# Altium PCB [1]BMS_AFE.PcbDoc (part 1 of 3)
Units mm, origin at the board's own origin, x right, y up, seen from the top; angles counter-clockwise.
Board outline 110 x 135 mm, 4 copper layers (Top Layer, Layer 1, Layer 2, Bottom Layer), stack 2.022 mm thick; 197 components, 113 nets, 551 pads, 368 vias.
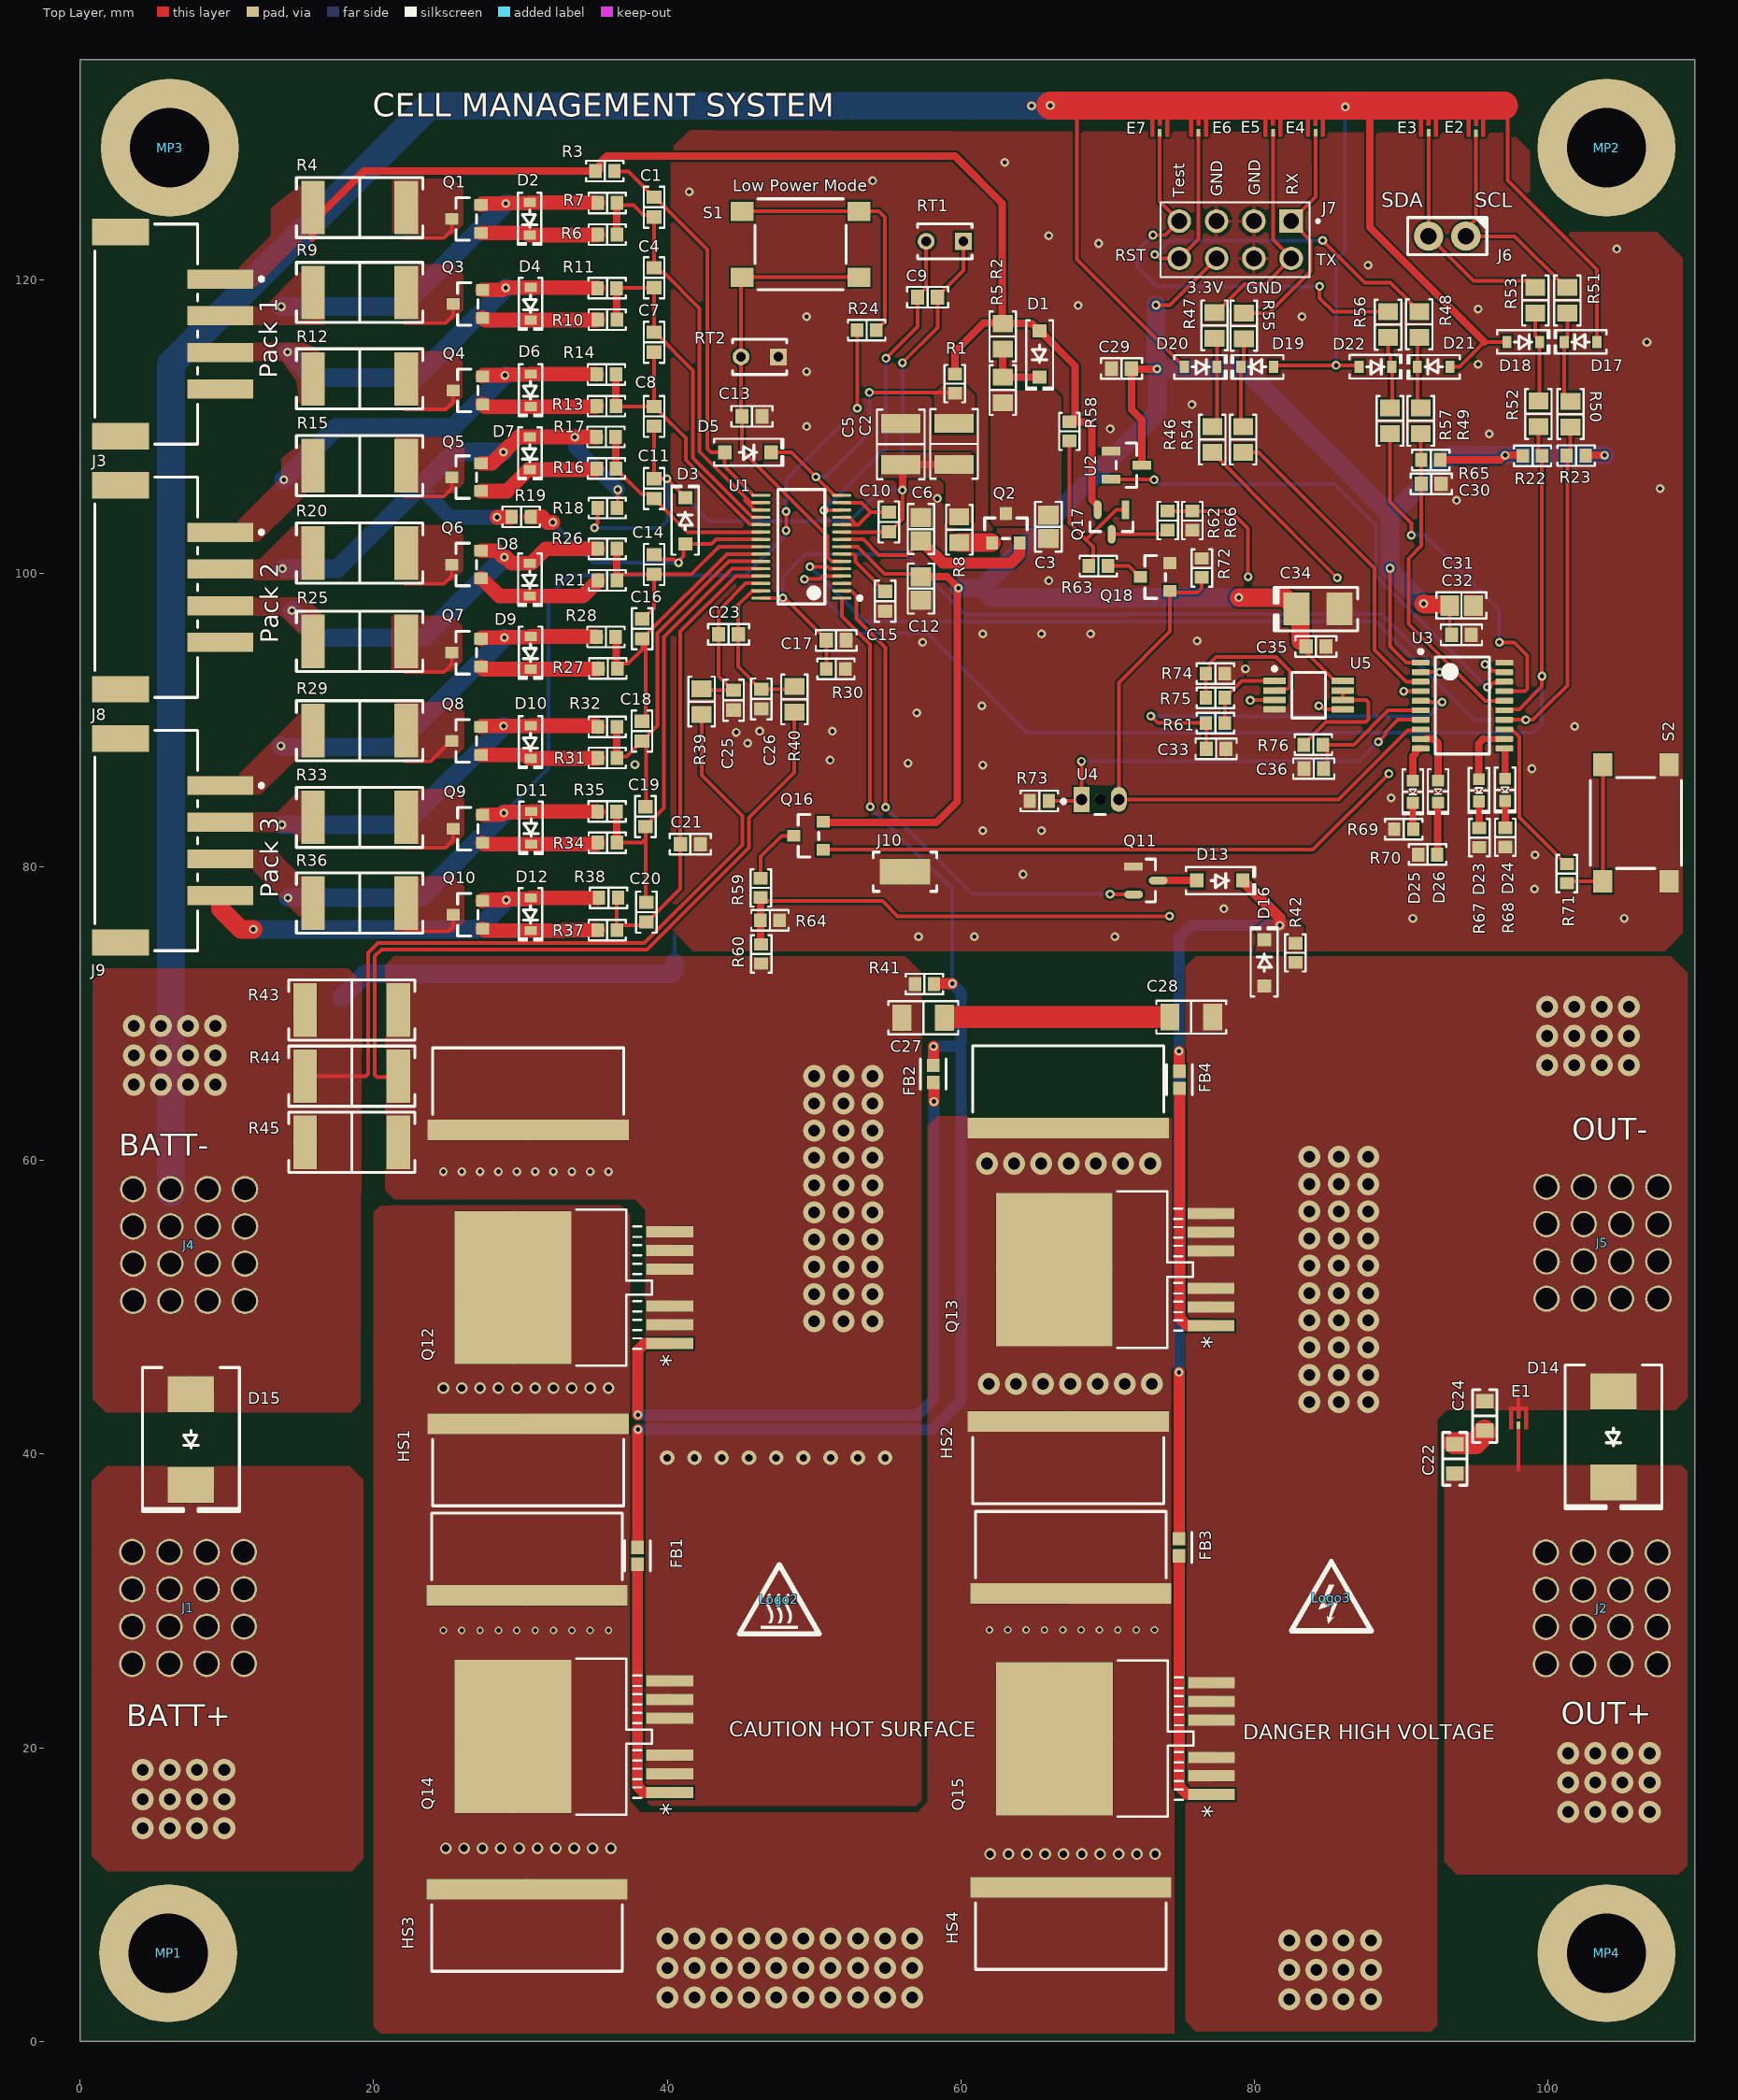
[diagram p0: Top Layer view]
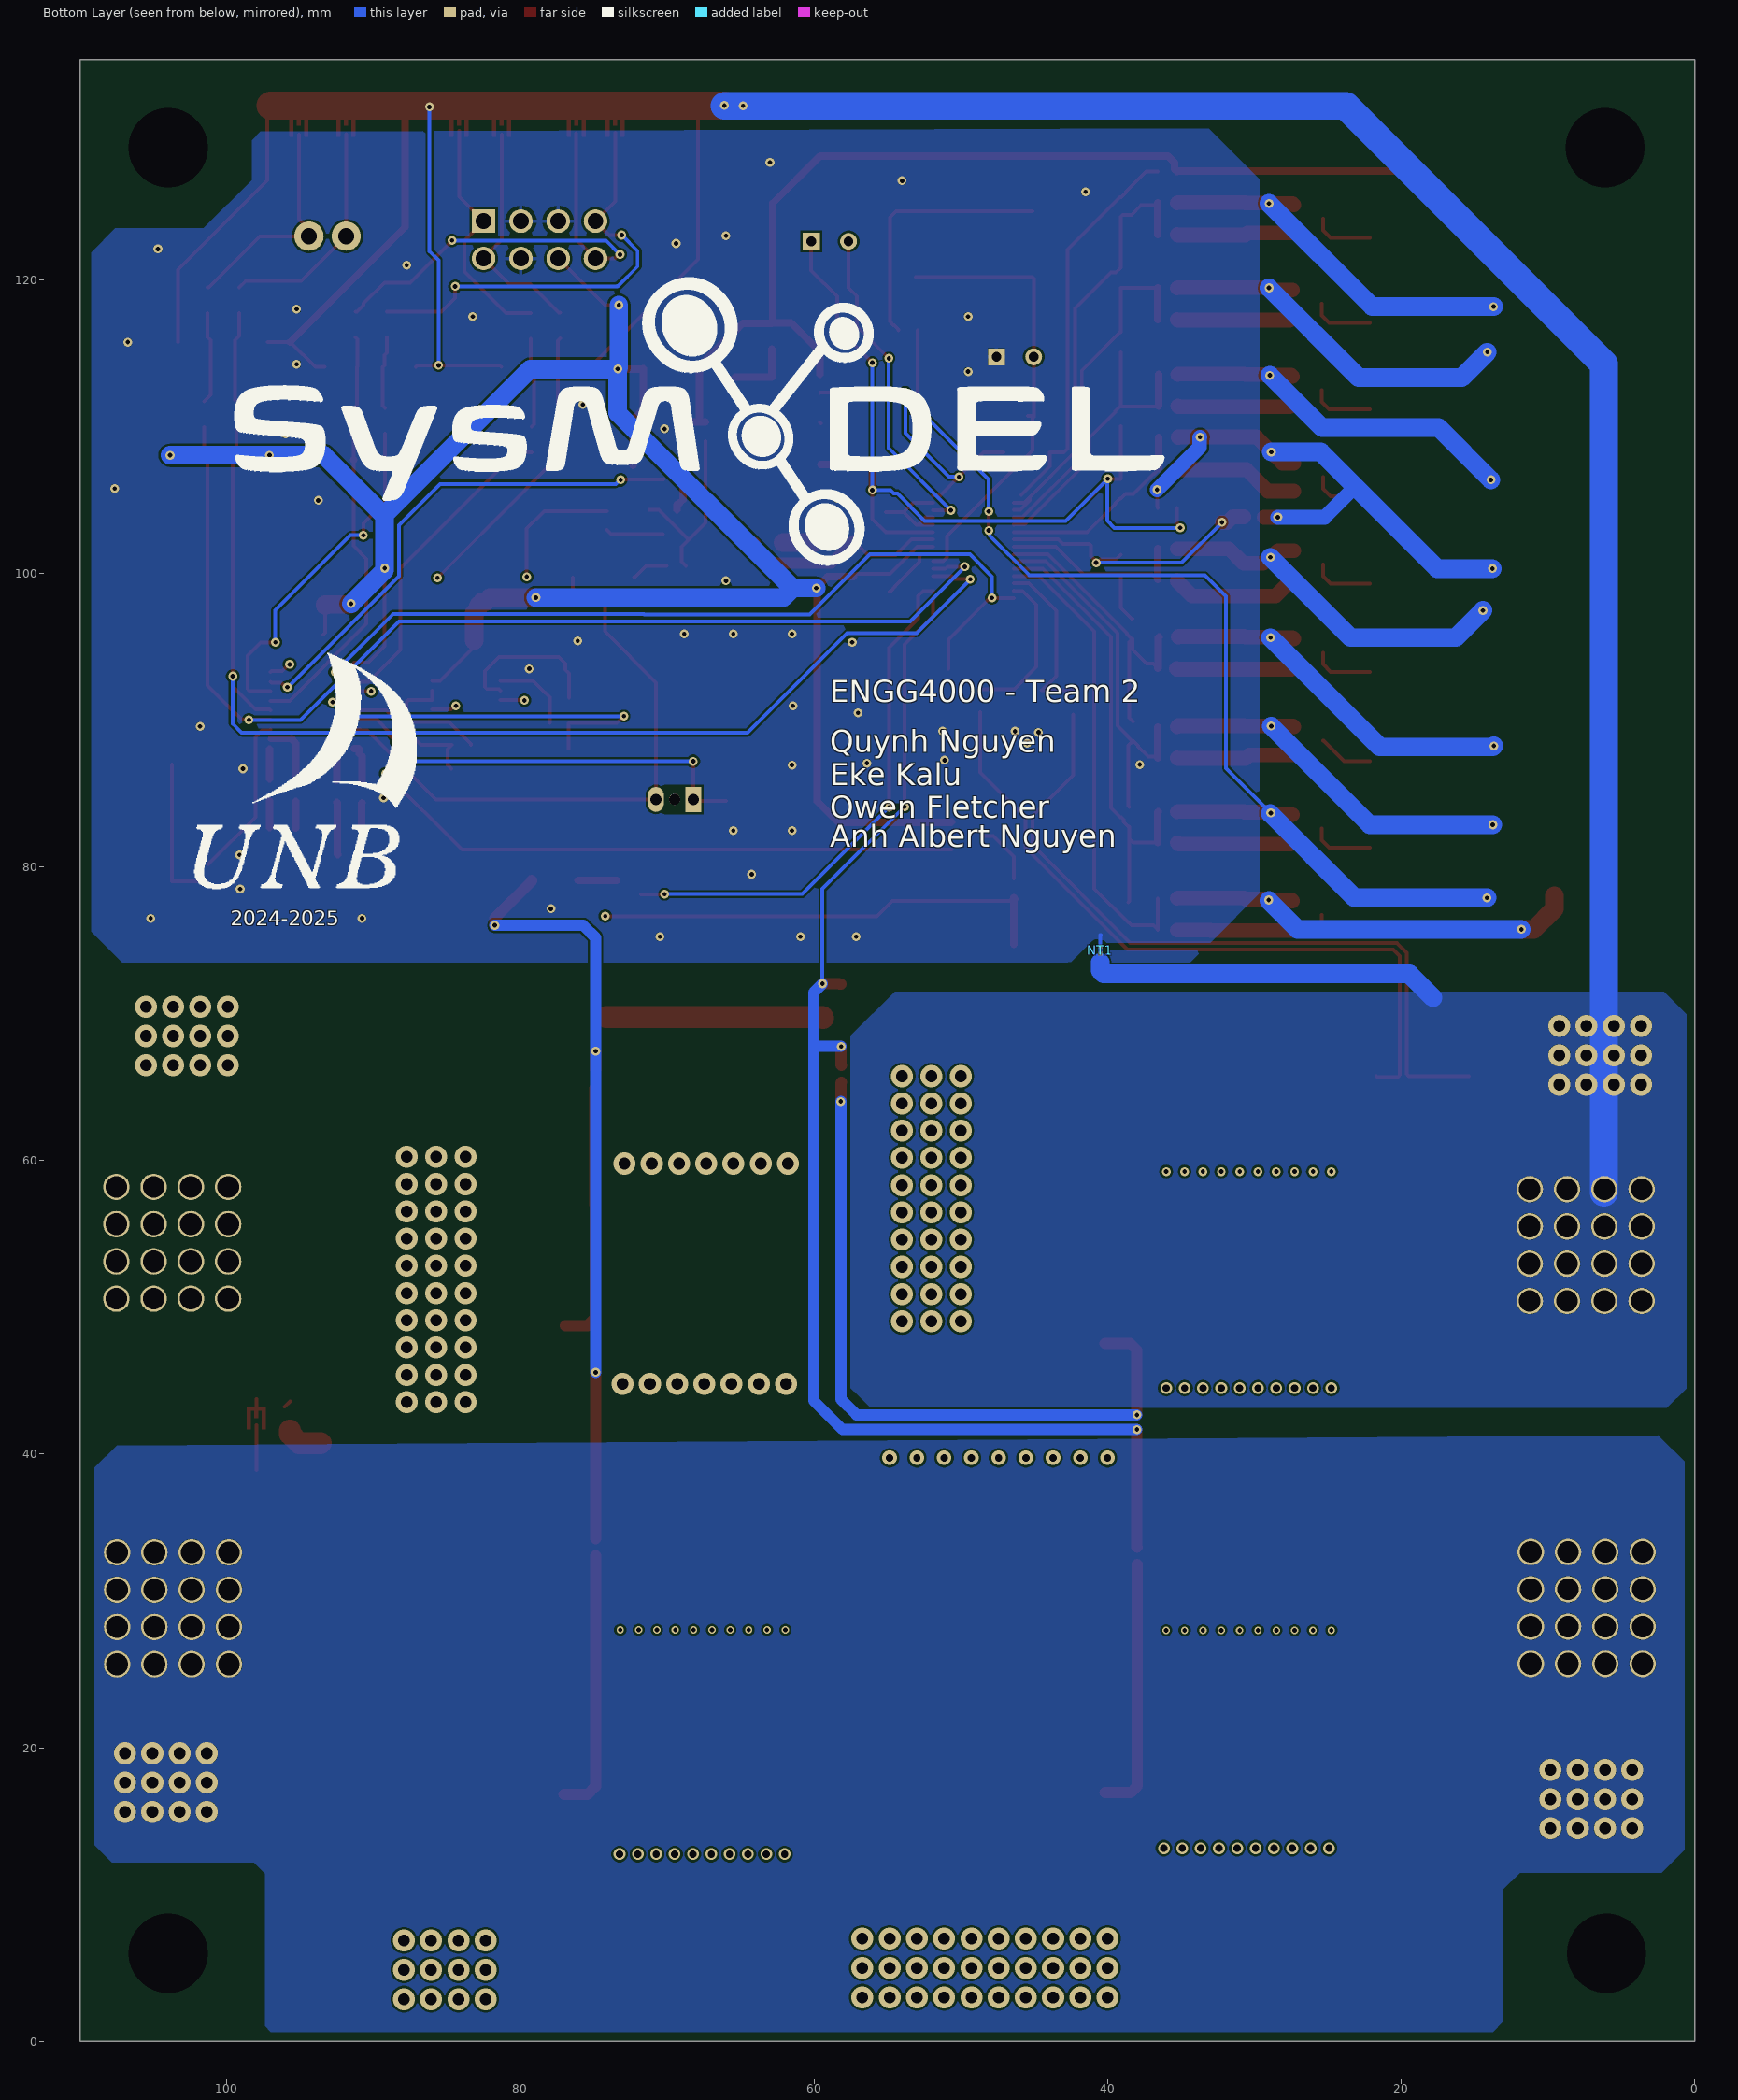
[diagram p1: Bottom Layer view, seen from below]
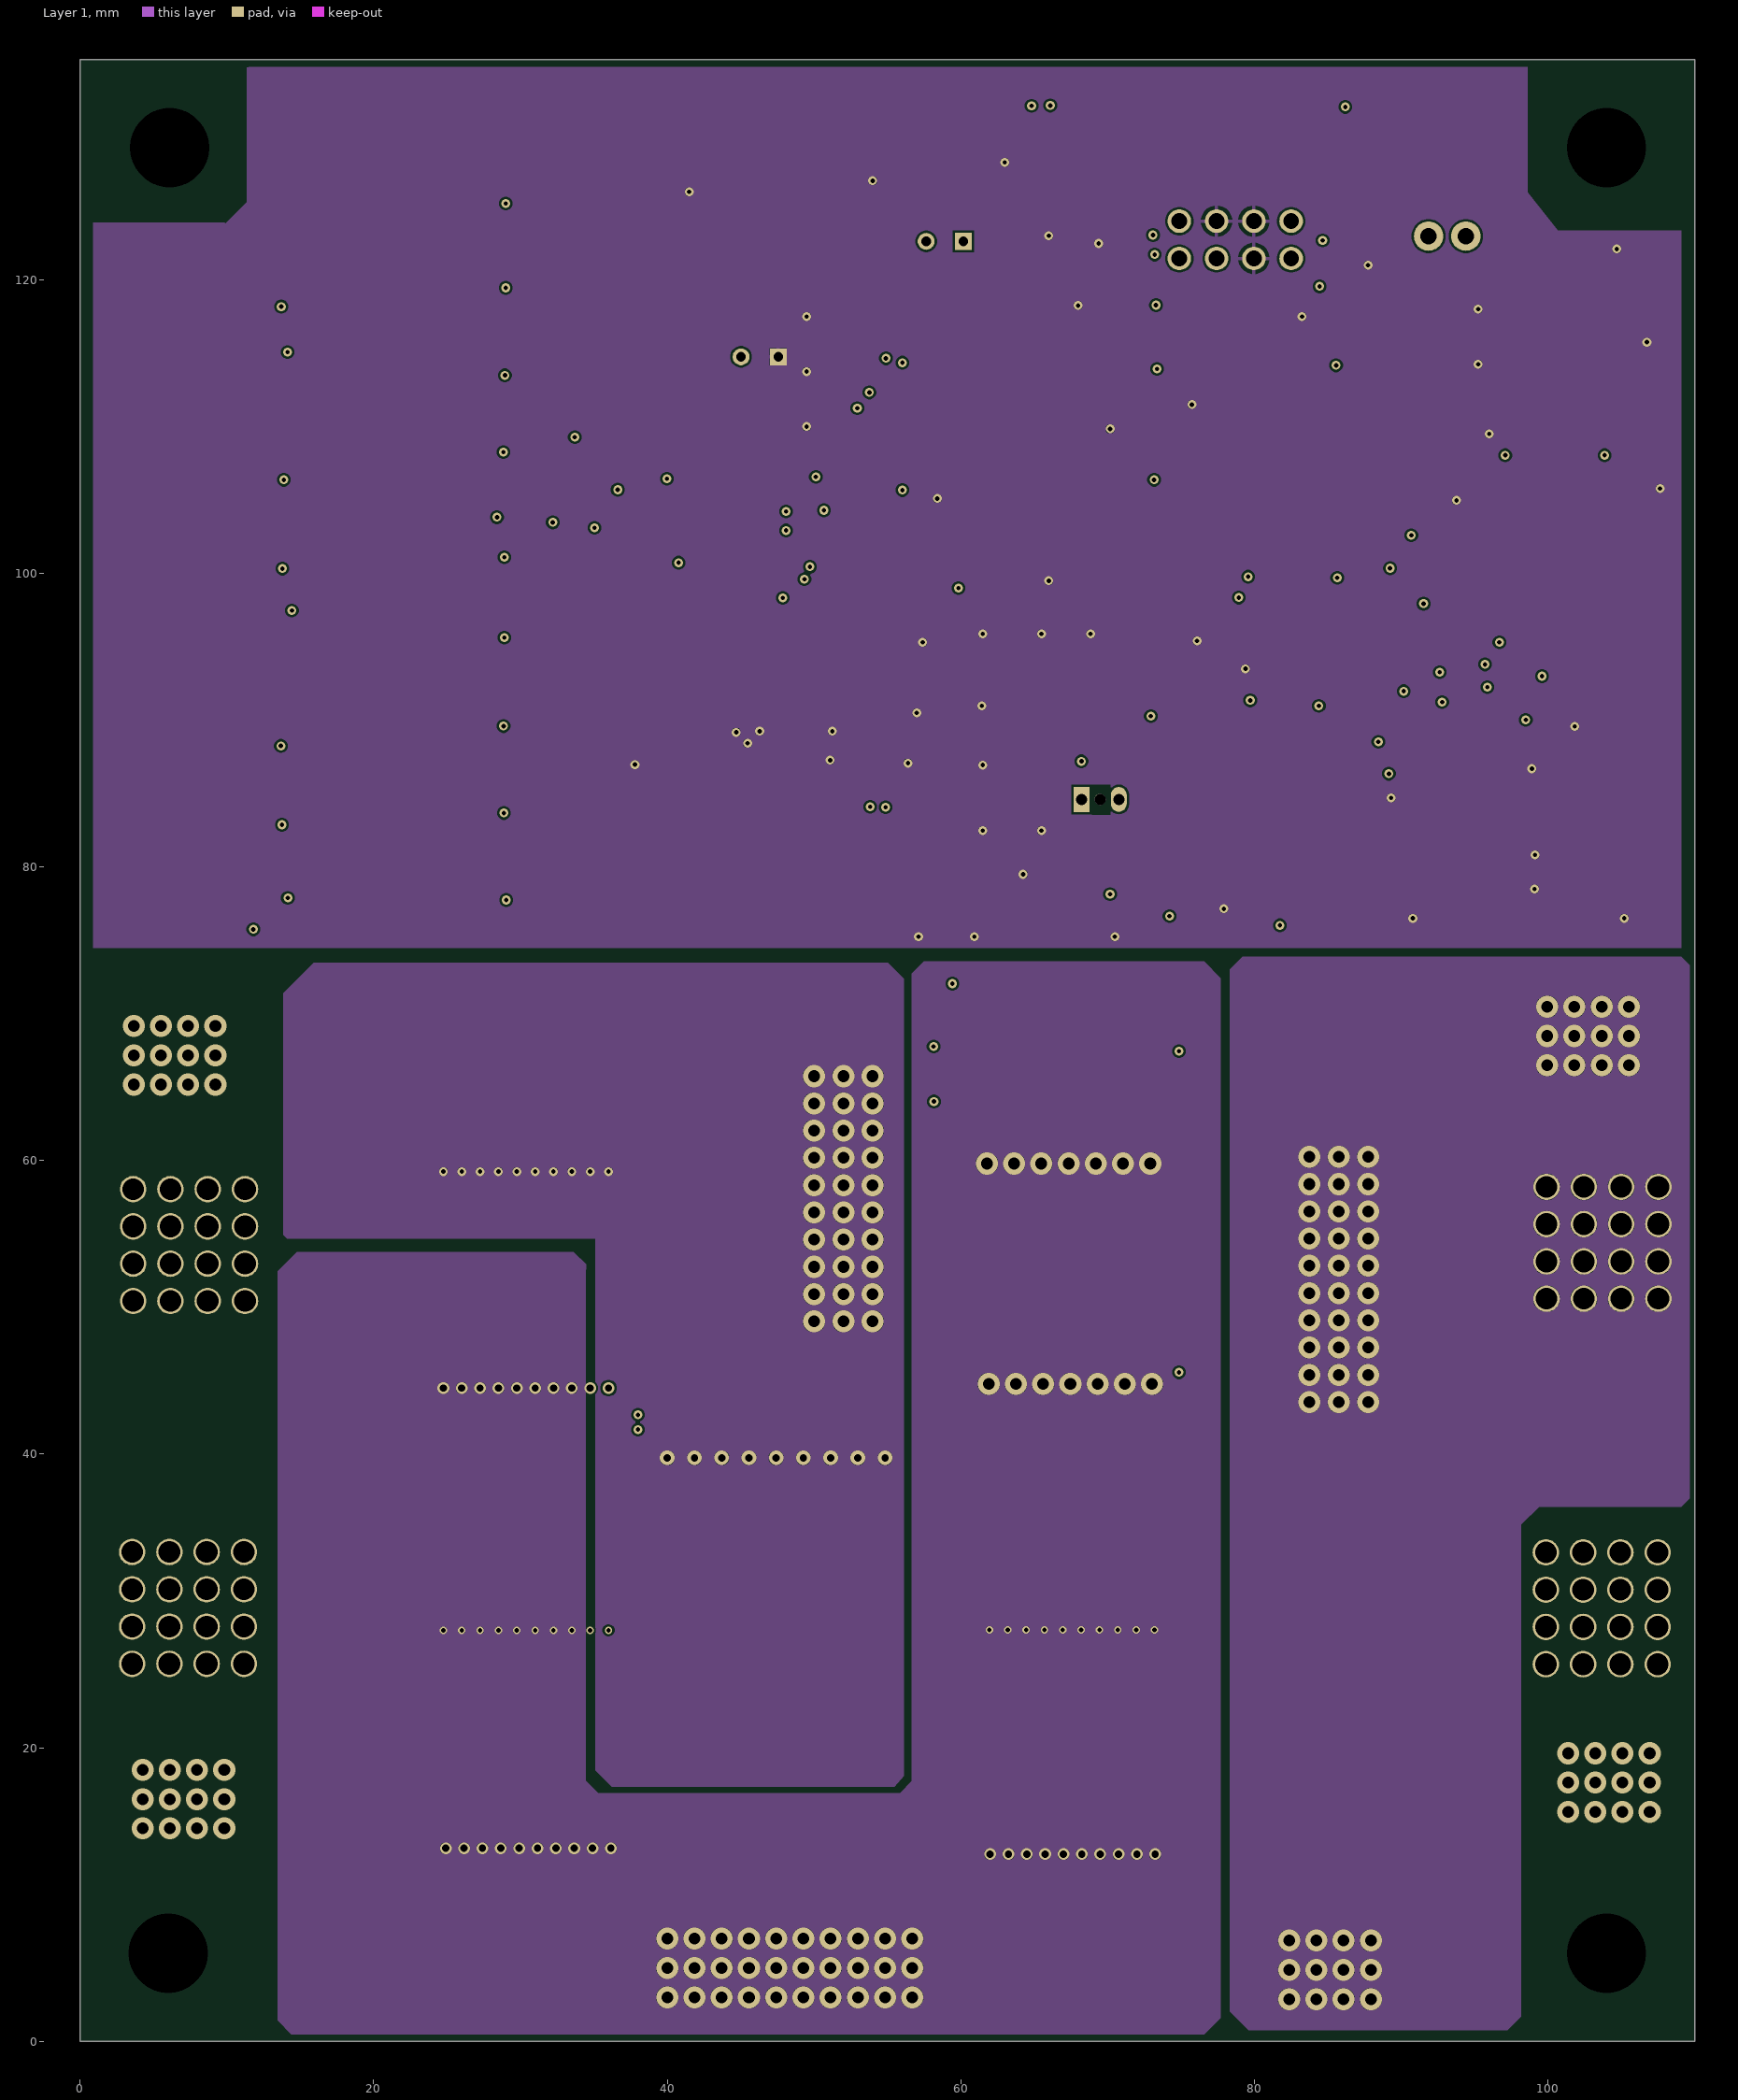
[diagram p2: Layer 1]
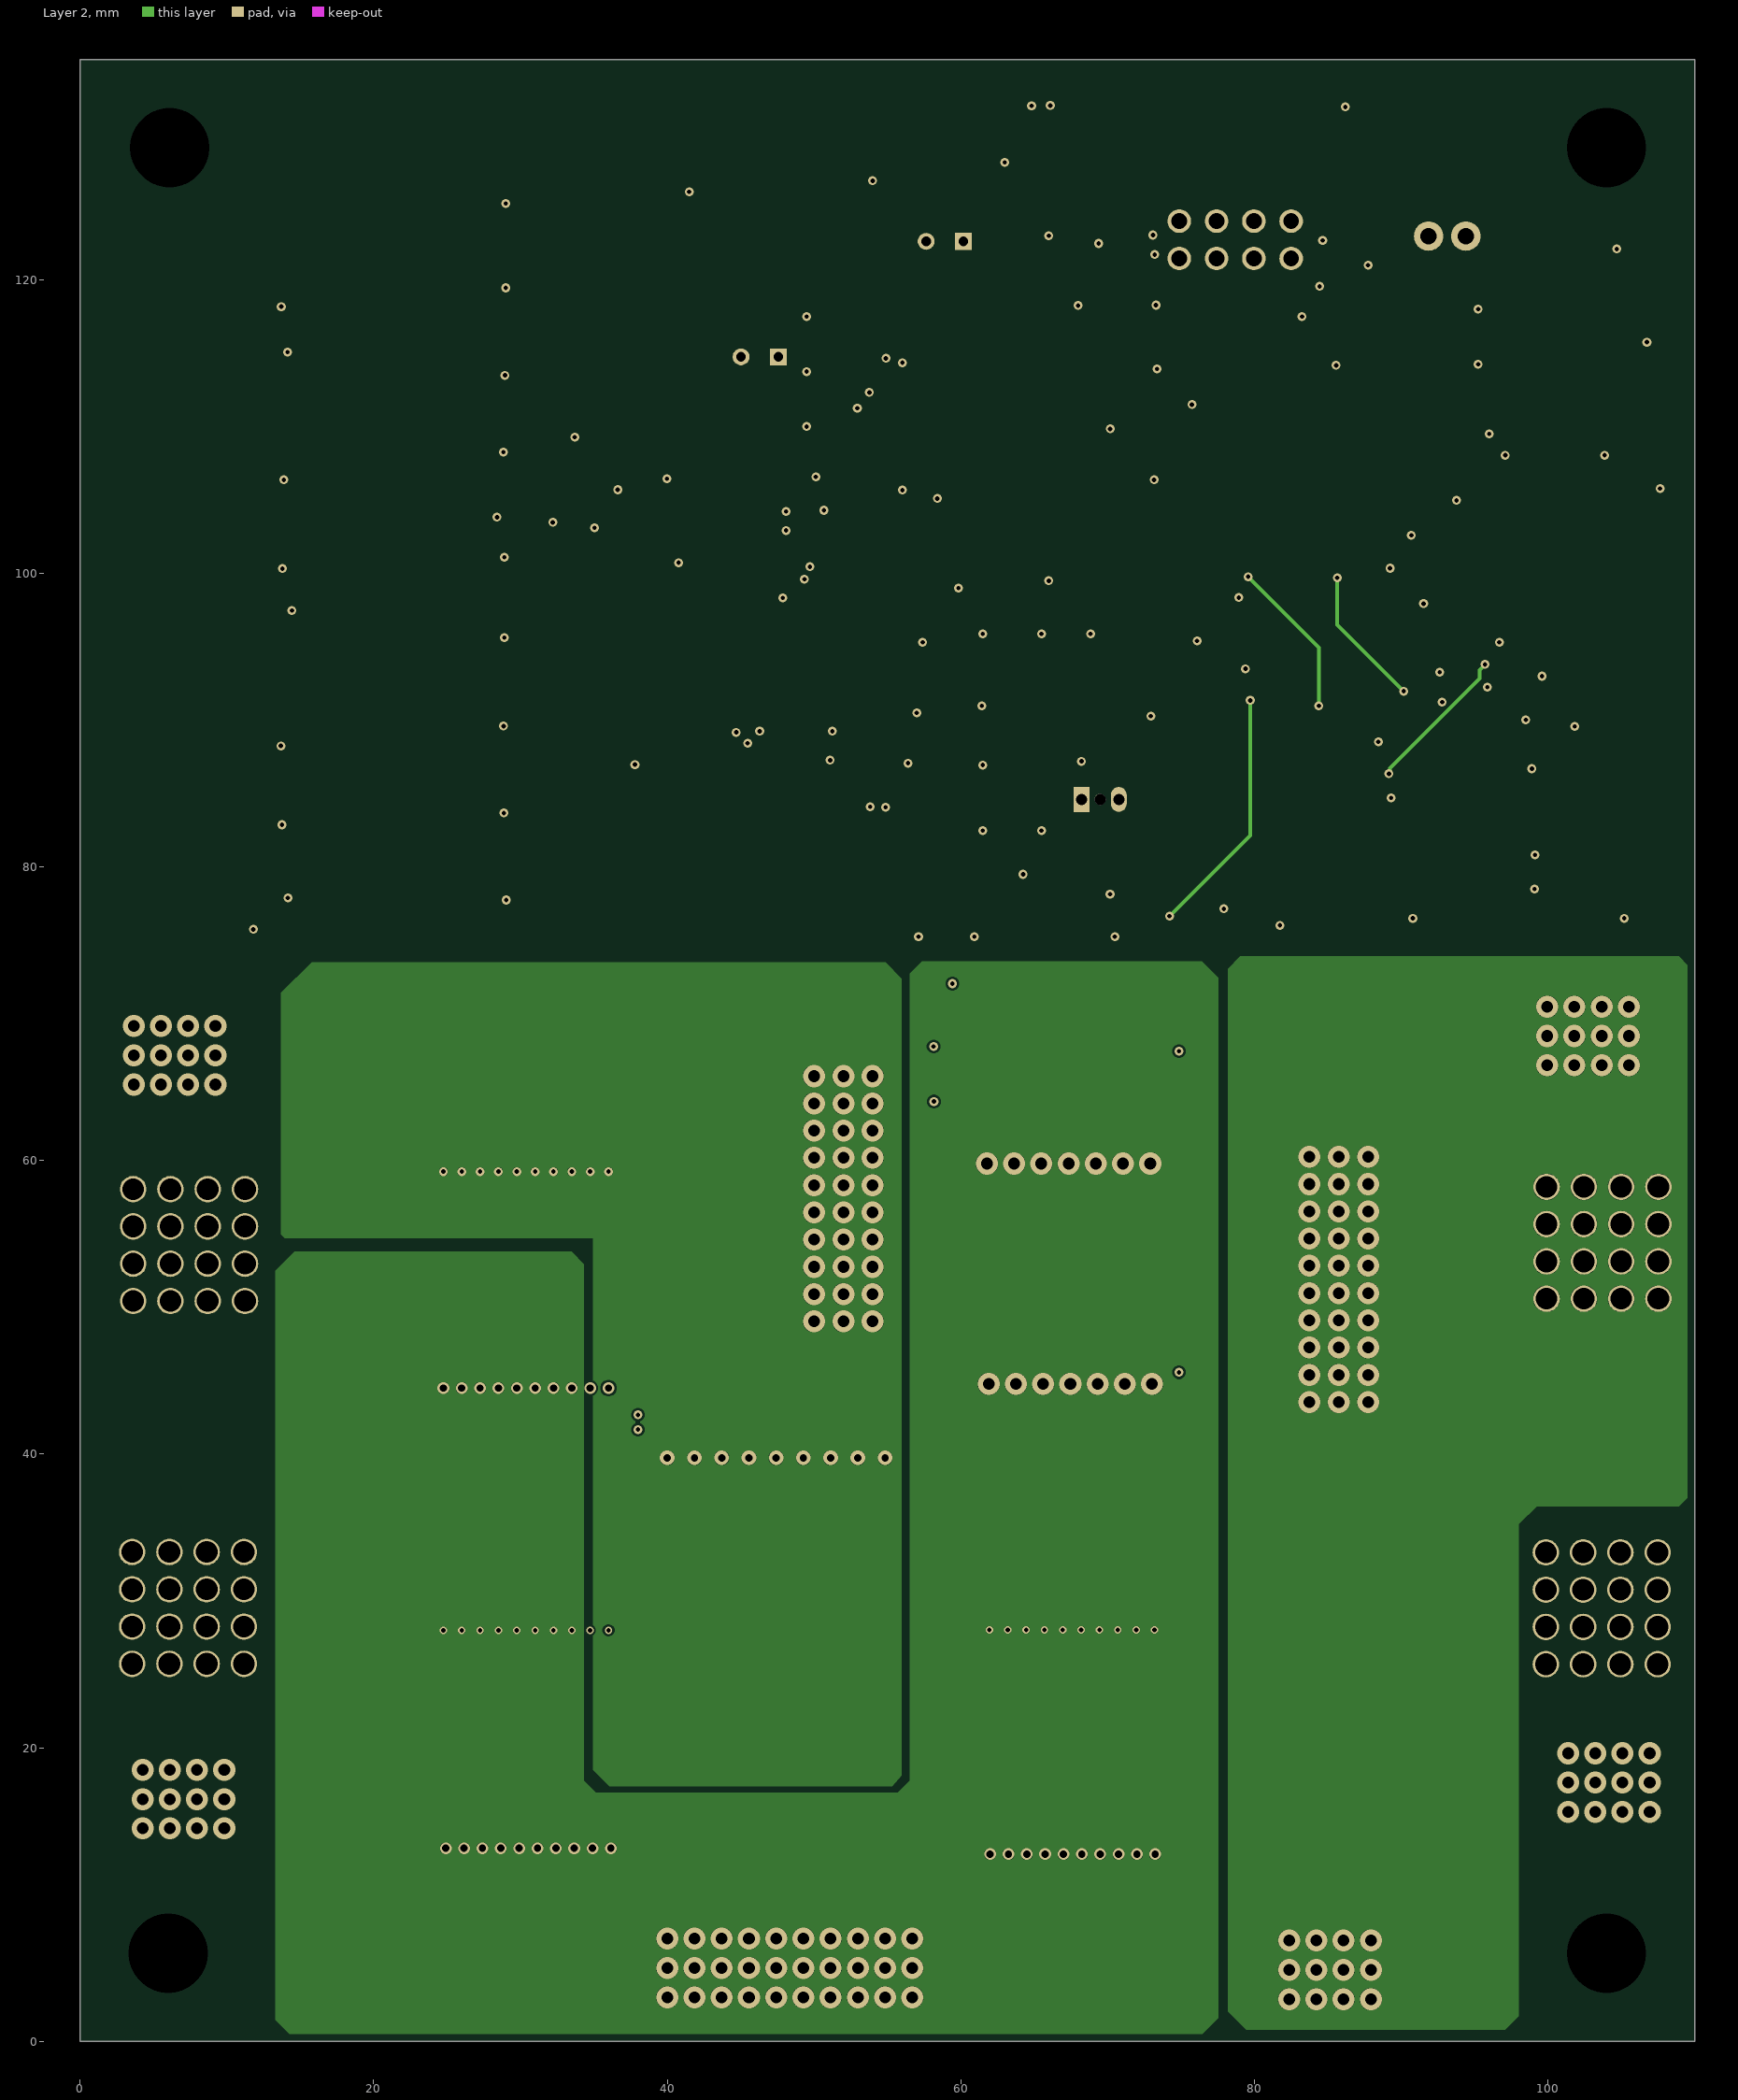
[diagram p3: Layer 2]
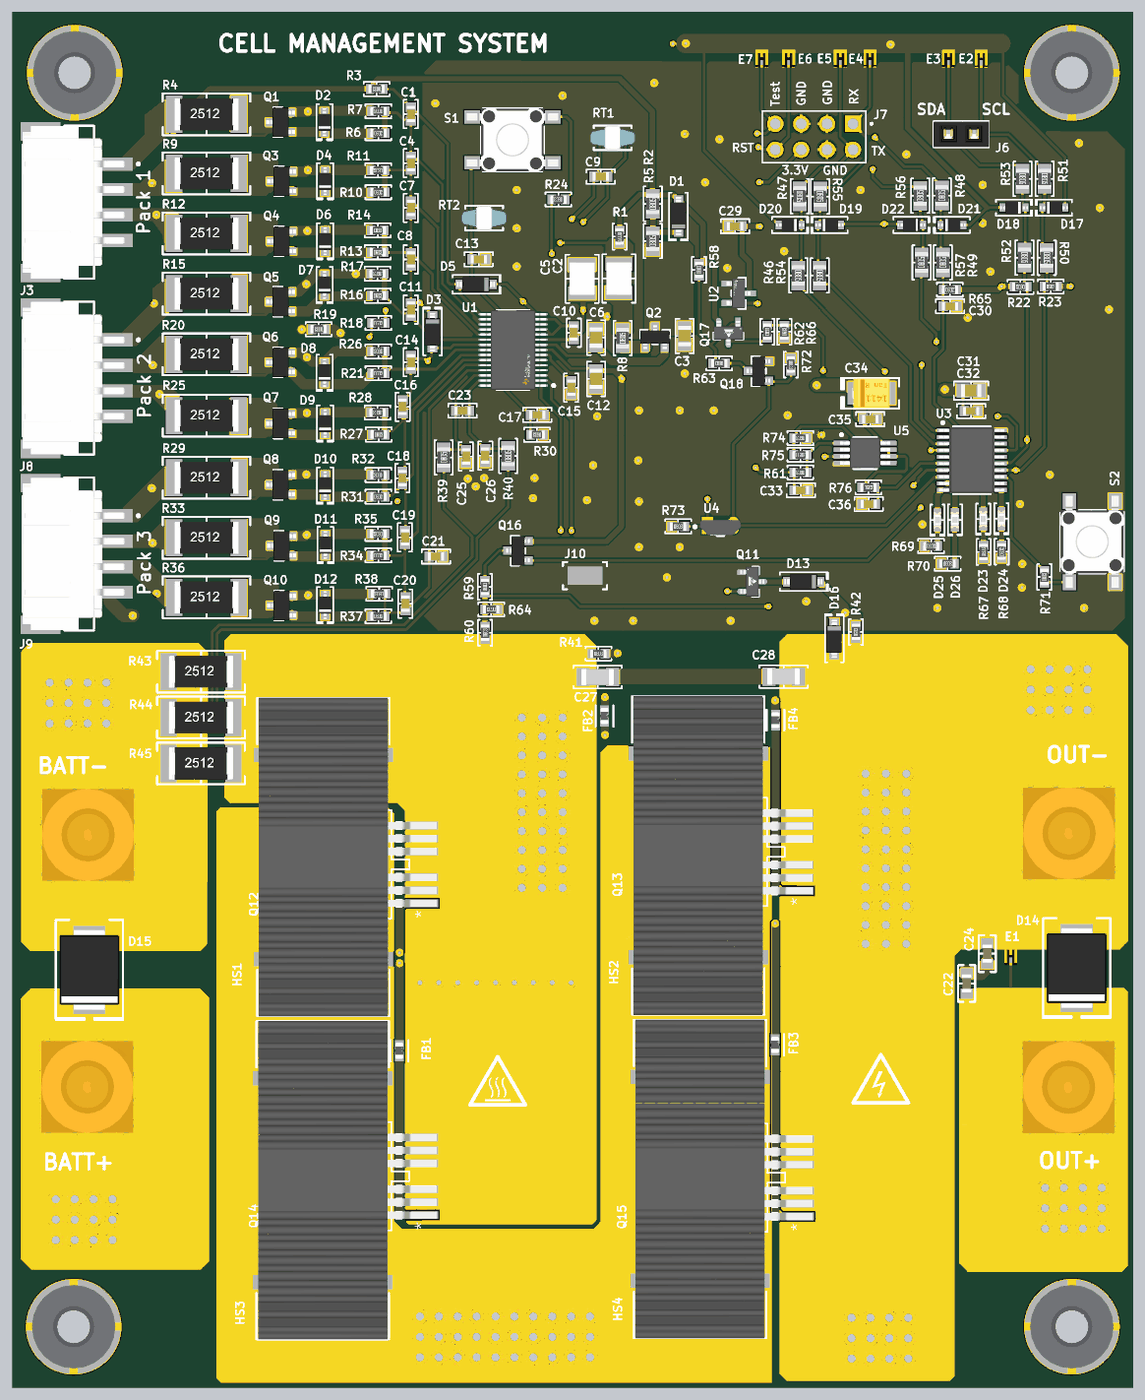
[diagram p5: 3D render of the assembled board from above, using the file's embedded part models]

## Layer stack, top to bottom
Top Solder: solder mask 0.0102, Solder Resist, Dk 3.5
Top Layer: signal copper 0.07
Dielectric 2: prepreg 0.0711, PP-006, Dk 4.1
Layer 1: signal copper 0.07
Dielectric 1: core 1.6, FR-4, Dk 4.8
Layer 2: signal copper 0.07
Dielectric 3: prepreg 0.0711, PP-006, Dk 4.1
Bottom Layer: signal copper 0.07
Bottom Solder: solder mask 0.0102, Solder Resist, Dk 3.5

## Board outline
0,0 110,0 110,135 0,135

## Design rules (kind name [scope] priority, off if disabled: settings)
BoardOutlineClearance [All] p1: gap=0.2 ignorepadtopadclearanceinfootprint=FALSE
Clearance [All] p1: gap=0.15 ignorepadtopadclearanceinfootprint=TRUE except(0: Arc-Hole Track-Hole SMDPad-Hole THPad-Hole Via-Hole Fill-Hole Poly-Hole Region-Hole Text-Hole; 0.1: Arc-SMDPad Track-SMDPad; 0.2: Arc-Arc Arc-Track Arc-Via Track-Track Track-Via; 0.28: Arc-THPad Track-THPad)
HoleToHoleClearance [All] p1: gap=0.2 allowstackedmicrovias=TRUE
PolygonConnect [HasFootprint('HARWIN_M20-9760442')] p1: connectstyle=Relief reliefconductorwidth=0.254 reliefentries=4 polygonreliefangle="90 Angle" airgapwidth=0.254
RoutingVias [All] p1: holewidth=0.406 width=0.864 viastyle="Through Hole" minholewidth=0.15 minwidth=0.25 maxholewidth=2 maxwidth=2
SilkToSilkClearance [All] p1: silktosilkclearance=0.153
SilkToSolderMaskClearance SilkToSolderMaskClearance_1 [IsPad] p1: minsilkscreentomaskgap=0.254 clearancetoexposedcopper=TRUE
SolderMaskExpansion [All] p1: expansion=0.102 istentingtop=FALSE
SupplyNets "Schematic Supply Nets_1" [InNet('BATT-')] p1: voltage=0.000
SupplyNets "Schematic Supply Nets" [InNet('GND')] p2: voltage=0.000
UnRoutedNet [All] p1: checkbadconnections=TRUE
Width [All] p1: maxlimit=2539.975 minlimit=0.16 preferedwidth=0.254 midlayer1_maxwidth=1181.566 midlayer2_maxwidth=1181.566 minimp=50.000000 maximp=50.000000 favimp=50.000000
26 further rules are at their usual default settings.

## Classes and differential pairs
component class BMS_MCU: C29 C30 C31 C32 C33 C34 C35 C36 D17 D18 D19 D20 D21 D22 D23 D24 D25 D26 E2 E3 E4 E5 E6 E7 J7 J10 Q16 Q17 Q18 R46 R47 R48 R49 R50 R51 R52 R53 R54 R55 R56 R57 R58 R59 R60 R61 R62 R63 R64 R65 R66 R67 R68 R69 R70 R71 R72 R73 R74 R75 R76 S2 U2 U3 U4 U5
component class BMS_FETs: BATT- C22 C23 C24 C25 C26 C27 C28 D13 D14 D15 D16 E1 FB1 FB2 FB3 FB4 HS1 HS2 HS3 HS4 J1 J2 J5 NT1 Q11 Q12 Q13 Q14 Q15 R39 R40 R41 R42 R43 R44 R45
component class BMS_AFE: C1 C2 C3 C4 C5 C6 C7 C8 C9 C10 C11 C12 C13 C14 C15 C16 C17 C18 C19 C20 C21 D1 D2 D3 D4 D5 D6 D7 D8 D9 D10 D11 D12 J3 J8 J9 MP1 MP2 MP3 MP4 Q1 Q2 Q3 Q4 Q5 Q6 Q7 Q8 Q9 Q10 R1 R2 R3 R4 R5 R6 R7 R8 R9 R10 R11 R12 R13 R14 R15 R16 R17 R18 R19 R20 R21 R22 R23 R24 R25 R26 R27 R28 R29 R30 R31 R32 R33 R34 R35 R36 R37 R38 RT1 RT2 S1 U1

## Components (designator, comment, footprint, x,y, rotation, side; value= is the part's Value field where it differs from the comment)
C1 "0.22 µF" "CAP 0603_1608" 39.105,124.95 r90 top
C2 "10 µF" "CAP 1210_3225 - 1MM" 59.54,108.818 r90 top
C3 "1 µF" "CAP 0805_2012" 65.975,103.175 r90 top
C4 "0.22 µF" "CAP 0603_1608" 39.105,120.14 r90 top
C5 "10 µF" "CAP 1210_3225 - 1MM" 55.915,108.793 r270 top
C6 "1 µF" "CAP 0805_2012" 57.29,103.018 r270 top
C7 "0.22 µF" "CAP 0603_1608" 39.105,115.747 r90 top
C8 "0.22 µF" "CAP 0603_1608" 39.105,110.693 r90 top
C9 "4700 pF" "CAP 0603_1608" 57.74,118.818 r180 top
C10 "1 µF" "CAP 0603_1608" 55.1,103.5 r270 top
C11 "0.22 µF" "CAP 0603_1608" 39.105,105.769 r270 top
C12 "4.7 µF" "CAP 0805_2012" 57.29,98.968 r90 top
C13 "4700 pF" "CAP 0603_1608" 45.775,110.7 r180 top
C14 "0.22 µF" "CAP 0603_1608" 39.105,100.604 r90 top
C15 "1 µF" "CAP 0603_1608" 54.85,98.1 r270 top
C16 "0.22 µF" "CAP 0603_1608" 38.3,96.225 r90 top
C17 "470 pF" "CAP 0603_1608" 51.515,95.443 r180 top
C18 "0.22 µF" "CAP 0603_1608" 38.275,89.25 r90 top
C19 "0.22 µF" "CAP 0603_1608" 38.525,83.425 r90 top
C20 "0.22 µF" "CAP 0603_1608" 38.576,76.924 r90 top
C21 "0.22 µF" "CAP 0603_1608" 41.575,81.55 r180 top
C22 "0.1 µF" "MURATA GRM188 0603_1608" 93.675,39.675 r270 top
C23 "0.1 µF" "CAP 0603_1608" 44.175,95.85 r0 top
C24 "0.1 µF" "MURATA GRM188 0603_1608" 95.7,42.6 r270 top
C25 "0.1 µF" "CAP 0603_1608" 44.515,91.368 r90 top
C26 "0.1 µF" "CAP 0603_1608" 46.415,91.443 r270 top
C27 "0.1 µF" "CAP 1206_3216 - 0.8MM" 57.45,69.725 r0 top
C28 "0.1 µF" "CAP 1206_3216 - 0.8MM" 75.7,69.775 r0 top
C29 "0.1 µF" "CAP 0603_1608" 70.95,113.95 r0 top
C30 "2200 pF" "CAP 0603_1608" 92.05,106.1 r180 top
C31 "4.7 µF" "CAP 0805_2012" 94.115,97.818 r180 top
C32 "0.1 µF" "CAP 0603_1608" 94.115,95.818 r180 top
C33 "1500 pF" "CAP 0603_1608" 77.4,88.05 r180 top
C34 "4.7 µF" "CAP POL 1411_3528" 84.34,97.575 r0 top
C35 "10000 pF" "CAP 0603_1608" 84.2,95.025 r180 top
C36 "1500 pF" "CAP 0603_1608" 84.05,86.7 r0 top
D1 "1N4148W-7-F" SOD-123 65.375,114.95 r270 top
D2 "MMSZ5232BS-7-F" SOD323 30.628,124.157 r270 top
D3 "1N4148W-7-F" SOD-123 41.225,103.575 r90 top
D4 "MMSZ5232BS-7-F" SOD323 30.687,118.362 r270 top
D5 "1N4148W-7-F" SOD-123 45.5,108.25 r0 top
D6 "MMSZ5232BS-7-F" SOD323 30.687,112.471 r270 top
D7 "MMSZ5232BS-7-F" SOD323 30.64,108.181 r270 top
D8 "MMSZ5232BS-7-F" SOD323 30.64,99.568 r270 top
D9 "MMSZ5232BS-7-F" SOD323 30.687,94.593 r270 top
D10 "MMSZ5232BS-7-F" SOD323 30.687,88.507 r270 top
D11 "MMSZ5232BS-7-F" SOD323 30.723,82.671 r270 top
D12 "MMSZ5232BS-7-F" SOD323 30.687,76.776 r270 top
D13 "MMSD914T1G" SOD-123 77.65,79.075 r0 top
D14 "MURS360T3G" "DO214AB SMC" 104.475,41.175 r270 top
D15 "SMCJ75A-13-F" "DO214AB SMC" 7.55,41 r270 top
D16 "MMSZ5246B-7-F" SOD-123 80.675,73.475 r90 top
D17 "MMSZ5232BS-7-F" SOD323 102.229,115.77 r180 top
D18 "MMSZ5232BS-7-F" SOD323 98.329,115.77 r0 top
D19 "MMSZ5232BS-7-F" SOD323 80.202,114.068 r180 top
D20 "MMSZ5232BS-7-F" SOD323 76.34,114.068 r0 top
D21 "MMSZ5232BS-7-F" SOD323 92.219,114.067 r180 top
D22 "MMSZ5232BS-7-F" SOD323 88.255,114.076 r0 top
D23 "Green" "LED 0603_1608 GREEN" 95.305,85.217 r270 top
D24 "Green" "LED 0603_1608 GREEN" 97.089,85.25 r270 top
D25 "Green" "LED 0603_1608 GREEN" 90.8,85.12 r270 top
D26 "Green" "LED 0603_1608 GREEN" 92.523,85.142 r270 top
E1 "N/A" SPARK_GAP2 98,42.983 r180 top
E2 "N/A" SPARK_GAP2 95.1,131.008 r180 top
E3 "N/A" SPARK_GAP2 91.875,131.025 r180 top
E4 "N/A" SPARK_GAP2 84.175,131.033 r180 top
E5 "N/A" SPARK_GAP2 81.275,131.025 r180 top
E6 "N/A" SPARK_GAP2 76.2,131.025 r180 top
E7 "N/A" SPARK_GAP2 73.55,131.025 r180 top
FB1 "BLM18SG221TN1D" FP-BLM18-0_15-t0_5-IPC_C 37.975,33.075 r90 top
FB2 "BLM18SG221TN1D" FP-BLM18-0_15-t0_5-IPC_C 58.125,65.9 r90 top
FB3 "BLM18SG221TN1D" FP-BLM18-0_15-t0_5-IPC_C 74.875,33.65 r90 top
FB4 "BLM18SG221TN1D" FP-BLM18-0_15-t0_5-IPC_C 74.9,65.5 r90 top
HS1 "DA-T268-101E-TR" FP-DA-T268-101E-TR-MFG 30.525,52.075 r90 top
HS2 "DA-T268-101E-TR" FP-DA-T268-101E-TR-MFG 67.325,52.225 r90 top
HS3 "DA-T268-101E-TR" FP-DA-T268-101E-TR-MFG 30.45,20.375 r90 top
HS4 "DA-T268-101E-TR" FP-DA-T268-101E-TR-MFG 67.5,20.5 r90 top
J1 "BATT+" "7461147_chemical surface" 7.35,29.525 r0 top
J2 "OUT+" "7461147_chemical surface" 103.675,29.5 r0 top
J3 "Pack 1" FP-S4B-XH-SM4-TB_LF_SN-MFG 4.5,116.3 r270 top
J4 "BATT-" "7461147_chemical surface" 7.42,54.245 r0 top
J5 "OUT-" "7461147_chemical surface" 103.725,54.4 r0 top
J6 "M20-7820242" "HARWIN M20-7820245" 93.145,122.975 r270 top
J7 "M20-9760442" HARWIN_M20-9760442 78.7,122.725 r180 top
J8 "Pack 2" FP-S4B-XH-SM4-TB_LF_SN-MFG 4.5,99.05 r270 top
J9 "Pack 3" FP-S4B-XH-SM4-TB_LF_SN-MFG 4.5,81.8 r270 top
J10 "5015" FP-5015-MFG 56.2,79.675 r0 top
Logo2 "CAUTION HOT SURFACE" IEC_HotSurface_Small 47.634,30.125 r0 top
Logo3 "DANGER HIGH VOLTAGE" IEC_HighVoltage_Small 85.25,30.2 r0 top
MP1 "9774050482R" 9774050482 6,6 r0 top
MP2 "9774050482R" 9774050482 104,129 r0 top
MP3 "9774050482R" 9774050482 6.1,129 r0 top
MP4 "9774050482R" 9774050482 104,6 r0 top
NT1 "Net-Tie" Net-Tie_10mil 40.5,74.329 r270 bottom net-tie
Q1 "DMN1019USN-7" "DIODES SOT-23-3" 26.315,124.149 r180 top
Q2 "2N7002ET1G" "ON SEMI SOT-23-3" 63.075,103.075 r90 top
Q3 "DMN1019USN-7" "DIODES SOT-23-3" 26.415,118.362 r180 top
Q4 "DMN1019USN-7" "DIODES SOT-23-3" 26.415,112.471 r180 top
Q5 "DMN1019USN-7" "DIODES SOT-23-3" 26.315,106.557 r180 top
Q6 "DMN1019USN-7" "DIODES SOT-23-3" 26.315,100.604 r180 top
Q7 "DMN1019USN-7" "DIODES SOT-23-3" 26.315,94.593 r180 top
Q8 "DMN1019USN-7" "DIODES SOT-23-3" 26.315,88.593 r180 top
Q9 "DMN1019USN-7" "DIODES SOT-23-3" 26.415,82.608 r180 top
Q10 "DMN1019USN-7" "DIODES SOT-23-3" 26.415,76.743 r180 top
Q11 "TP0610K-T1-GE3" FP-S-03946-IPC_C 72.615,79.075 r0 top
Q12 "STH315N10F7-6" H2PAK-6_STM 32.263,51.345 r90 top
Q13 "STH315N10F7-6" H2PAK-6_STM 69.138,52.57 r90 top
Q14 "STH315N10F7-6" H2PAK-6_STM 32.263,20.755 r90 top
Q15 "STH315N10F7-6" H2PAK-6_STM 69.163,20.62 r90 top
Q16 "FDN306P" "ON SEMI SOT-23-3" 49.625,82.125 r180 top
Q17 "TP0610K-T1-GE3" FP-S-03946-IPC_C 70.275,103.5 r270 top
Q18 "2N7002ET1G" "ON SEMI SOT-23-3" 73.25,99.75 r180 top
R1 "1 kOhms" "RES 0603_1608" 59.6,112.925 r270 top
R2 "100 kOhms" "RES 0805_2012" 62.865,116.143 r90 top
R3 "1 kOhms" "RES 0603_1608" 35.749,127.414 r180 top
R4 "28.7 Ohms" "RES 2512_6432" 19.04,124.924 r0 top
R5 "100 Ohms" "RES 0805_2012" 62.865,112.493 r90 top
R6 "10 kOhms" "RES 0603_1608" 35.915,123.079 r0 top
R7 "1 kOhms" "RES 0603_1608" 35.915,125.235 r180 top
R8 "100 kOhms" "RES 0805_2012" 59.9,102.975 r90 top
R9 "28.7 Ohms" "RES 2512_6432" 19.04,119.137 r0 top
R10 "10 kOhms" "RES 0603_1608" 35.915,117.284 r0 top
R11 "1 kOhms" "RES 0603_1608" 35.9,119.425 r180 top
R12 "28.7 Ohms" "RES 2512_6432" 19.04,113.246 r0 top
R13 "10 kOhms" "RES 0603_1608" 35.859,111.393 r0 top
R14 "1 kOhms" "RES 0603_1608" 35.859,113.549 r180 top
R15 "28.7 Ohms" "RES 2512_6432" 19.04,107.332 r0 top
R16 "10 kOhms" "RES 0603_1608" 35.859,107.139 r0 top
R17 "1 kOhms" "RES 0603_1608" 35.825,109.3 r180 top
R18 "1 kOhms" "RES 0603_1608" 35.915,104.453 r0 top
R19 "1 kOhms" "RES 0603_1608" 30.05,103.85 r180 top
R20 "28.7 Ohms" "RES 2512_6432" 19.04,101.379 r0 top
R21 "10 kOhms" "RES 0603_1608" 35.915,99.526 r0 top
R22 "10 kOhms" "RES 0603_1608" 98.957,108.009 r180 top
R23 "10 kOhms" "RES 0603_1608" 101.927,108.028 r0 top
R24 "3 kOhms" "RES 0603_1608" 53.59,116.568 r180 top
R25 "28.7 Ohms" "RES 2512_6432" 19.04,95.368 r0 top
R26 "1 kOhms" "RES 0603_1608" 35.915,101.682 r180 top
R27 "10 kOhms" "RES 0603_1608" 35.952,93.514 r0 top
R28 "1 kOhms" "RES 0603_1608" 35.825,95.675 r180 top
R29 "28.7 Ohms" "RES 2512_6432" 19.04,89.282 r0 top
R30 "499 kOhms" "RES 0603_1608" 51.49,93.493 r180 top
R31 "10 kOhms" "RES 0603_1608" 35.915,87.429 r0 top
R32 "1 kOhms" "RES 0603_1608" 35.915,89.543 r180 top
R33 "28.7 Ohms" "RES 2512_6432" 19.04,83.383 r0 top
R34 "10 kOhms" "RES 0603_1608" 35.915,81.658 r0 top
R35 "1 kOhms" "RES 0603_1608" 35.9,83.775 r180 top
R36 "28.7 Ohms" "RES 2512_6432" 19.04,77.551 r0 top
R37 "10 kOhms" "RES 0603_1608" 35.915,75.698 r0 top
R38 "1 kOhms" "RES 0603_1608" 36,77.9 r180 top
R39 "100 Ohms" "RES 0805_2012" 42.34,91.268 r90 top
R40 "100 Ohms" "RES 0805_2012" 48.665,91.418 r90 top
R41 "1 MOhms" "RES 0603_1608" 57.525,72.025 r0 top
R42 "1 MOhms" "RES 0603_1608" 82.8,74.15 r90 top
R43 "1 mOhms" "RES 2512_6432" 18.5,70.25 r0 top
R44 "1 mOhms" "RES 2512_6432" 18.5,65.75 r0 top
R45 "1 mOhms" "RES 2512_6432" 18.5,61.25 r0 top
R46 "100 Ohms" "RES 0805_2012" 77.14,109.118 r270 top
R47 "100 Ohms" "RES 0805_2012" 77.29,116.893 r270 top
R48 "100 Ohms" "RES 0805_2012" 91.242,116.965 r90 top
R49 "100 Ohms" "RES 0805_2012" 91.342,110.393 r90 top
R50 "100 Ohms" "RES 0805_2012" 101.544,110.849 r270 top
R51 "100 Ohms" "RES 0805_2012" 101.329,118.6 r270 top
R52 "100 Ohms" "RES 0805_2012" 99.357,110.864 r270 top
R53 "100 Ohms" "RES 0805_2012" 99.15,118.6 r270 top
R54 "100 Ohms" "RES 0805_2012" 79.24,109.118 r270 top
R55 "100 Ohms" "RES 0805_2012" 79.29,116.868 r270 top
R56 "100 Ohms" "RES 0805_2012" 89.115,116.943 r90 top
R57 "100 Ohms" "RES 0805_2012" 89.242,110.393 r90 top
R58 "100 kOhms" "RES 0603_1608" 67.4,109.675 r90 top
R59 "154 kOhms" "RES 0603_1608" 46.375,78.575 r90 top
R60 "1 kOhms" "RES 0603_1608" 46.4,74.075 r90 top
R61 "1.3 kOhms" "RES 0603_1608" 77.35,89.8 r180 top
R62 "110 kOhms" "RES 0603_1608" 74.1,103.6 r270 top
R63 "360 kOhms" "RES 0603_1608" 69.375,100.5 r180 top
R64 "10 kOhms" "RES 0603_1608" 47,76.368 r180 top
R65 "10 kOhms" "RES 0603_1608" 92.025,107.725 r0 top
R66 "10 kOhms" "RES 0603_1608" 75.775,103.6 r90 top
R67 "1 kOhms" "RES 0603_1608" 95.333,81.999 r90 top
R68 "1 kOhms" "RES 0603_1608" 97.108,82.024 r90 top
R69 "1 kOhms" "RES 0603_1608" 90.183,82.574 r0 top
R70 "1 kOhms" "RES 0603_1608" 91.808,80.849 r0 top
R71 "3 kOhms" "RES 0603_1608" 101.3,79.55 r90 top
R72 "100 kOhms" "RES 0603_1608" 76.425,100.375 r270 top
R73 "10 kOhms" "RES 0603_1608" 65.35,84.5 r0 top
R74 "1.3 kOhms" "RES 0603_1608" 77.35,93.175 r180 top
R75 "31.6 kOhms" "RES 0603_1608" 77.35,91.525 r0 top
R76 "1.3 kOhms" "RES 0603_1608" 84.025,88.325 r0 top
RT1 "103AT-2" FP-103AT-2-MFG 58.915,122.618 r180 top
RT2 "103AT-2" FP-103AT-2-MFG 46.3,114.75 r180 top
S1 "Low Power Mode" 430182070816 49.09,122.418 r180 top
S2 "430182070816" 430182070816 106,83 r270 top
U1 "BQ7693003DBTR" FP-DBT0030A-IPC_C 49.14,101.818 r180 top
U2 "TPS3839G33DBZR" FP-DBZ0003A-MFG 71.29,107.368 r0 top
U3 "MSP430G2553IPW20" PW0020A_L 94.183,90.999 r0 top
U4 "LMT01LPG" FP-LPG0002A-MFG 69.5,84.39 r0 top
U5 "LM7332MME/NOPB" DGK0008A_M 83.7,91.7 r0 top

## Footprints (in the part's own frame and the unit in brackets; to place one, negate y for a bottom-side part, rotate by r counter-clockwise, add the part's x,y. Pads: shape width x height; smd on the part's side, far side on the other; paste and mask are expansions set on the pad)
"7461147_chemical surface" [mm] "M5, blind 4mm"
  round 1.8 hole 1.475: 1(-3.81,-3.81) 1(-3.81,-1.27) 1(-3.81,1.27) 1(-3.81,3.81) 1(-1.27,-3.81) 1(-1.27,-1.27) 1(-1.27,1.27) 1(-1.27,3.81) 1(1.27,-3.81) 1(1.27,-1.27) 1(1.27,1.27) 1(1.27,3.81) 1(3.81,-3.81) 1(3.81,-1.27) 1(3.81,1.27) 1(3.81,3.81)
  body extent -4.5,-4.5 4.5,4.5, height 7
9774050482 [mm] "SMT Steel Spacer with internal Thread M4, height 5mm"
  round 9.4 / inner round 0 / far side round 0 hole 5.4 unplated: 1(0,0)
  body extent -4.1,-4.1 4.1,4.1, height 5
430182070816 [mm] "SMD Tact Switch, body 6x6mm"
  rect 1.55x1.3 smd: A1(-3.975,2.25) A2(3.975,2.25) B1(-3.975,-2.25) B2(3.975,-2.25)
  silkscreen extent -3.1,-3.1 3.1,3.1, body extent -4.5,-3.1 4.5,3.1, height 7
"CAP 0603_1608" [mm] "Chip Capacitor, 2-Leads, Body 1.60x0.80mm, IPC Medium Density"
  rect 0.9x1 smd: 1(-0.675,0) 2(0.675,0)
  silkscreen extent -1.4,-0.7 1.4,0.7, body extent -0.8,-0.41 0.8,0.41, height 0.82
"CAP 0805_2012" [mm] "Chip Capacitor, 2-Leads, Body 2.00x1.20mm, IPC Medium Density"
  rect 1.3x1.4 smd: 1(-0.8,0) 2(0.8,0)
  silkscreen extent -1.7,-0.9 1.7,0.9, body extent -1,-0.64 1,0.64, height 1.26
"CAP 1206_3216 - 0.8MM" [mm] "Chip Capacitor, 2-Leads, Body 3.25x1.60mm, IPC Medium Density"
  rect 1.3x1.8 smd: 1(-1.45,0) 2(1.45,0)
  silkscreen extent -2.37,-1.12 2.37,1.12, body extent -1.6,-0.8 1.6,0.8, height 0.8
"CAP 1210_3225 - 1MM" [mm] "Chip Capacitor, 2-Leads, Body 3.20x2.50mm, IPC Medium Density"
  rect 1.3x2.7 smd: 1(-1.4,0) 2(1.4,0)
  silkscreen extent -2.37,-1.63 2.37,1.63, body extent -1.6,-1.25 1.6,1.25, height 1
"CAP POL 1411_3528" [mm] "Molded Capacitor, 2-Leads, Body 3.50x2.80mm, IPC Medium Density"
  rect 1.8x2.23 smd: 1(-1.46,0) 2(1.46,0)
  silkscreen extent -3,-1.5 2.71,1.48, body extent -1.87,-1.45 1.86,1.45, height 2
DGK0008A_M [mm] "TSOP, 8-Leads, Body 3.1x3.1mm, Pitch 0.65mm, IPC Low Density"
  rrect22% 1.55x0.45 smd: 1(-2.325,0.975) 2(-2.325,0.325) 3(-2.325,-0.325) 4(-2.325,-0.975) 5(2.325,-0.975) 6(2.325,-0.325) 7(2.325,0.325) 8(2.325,0.975)
  silkscreen extent -2.45,-1.55 1.15,1.92, body extent -2.45,-1.5 2.45,1.5, height 0.94
"DIODES SOT-23-3" [mm] "SOT23, 3-Leads, Body 2.90x2.40mm, Pitch 0.95mm, IPC Medium Density"
  rect 0.9x0.8 smd: 1(-1,0.95) 2(-1,-0.95) 3(1,0)
  silkscreen extent -0.7,-1.45 0.7,1.45, body extent -1.41,-1.45 1.41,1.45, height 1.5
"DO214AB SMC" [mm] "Molded Diode, 2-Leads, Body 6.85x5.90mm, IPC Medium Density"
  rect 2.45x3.15 smd: 1(-3.1,0) 2(3.1,0)
  silkscreen extent -4.9,-3.3 4.9,3.3, body extent -3.97,-2.95 3.97,2.95, height 2.6
FP-103AT-2-MFG [mm]
  rect 1.15x1.15 hole 0.65 paste-2539.97 mask+0: 1(-1.27,0)
  round 1.15 hole 0.65 paste-2539.97 mask+0: 2(1.27,0)
  silkscreen extent -1.85,-1.2 1.85,1.2, body extent -1.95,-1.3 1.95,1.3, height 0.25
FP-5015-MFG [mm]
  rect 3.43x1.78 smd paste+0 mask+0: 1(0,0)
  silkscreen extent -2.16,-1.34 2.17,1.34
FP-BLM18-0_15-t0_5-IPC_C [mm]
  rect 0.906x0.858 smd paste+0 mask+0: 1(-0.576,0) 2(0.576,0)
  silkscreen extent -1.03,-0.87 1.03,0.87, body extent -1.13,-0.58 1.13,0.58, height 0.25
FP-DA-T268-101E-TR-MFG [mm] "New Heatsink"
  rect 1.4x13.7 smd paste+0 mask+0: 1(-10,0) 2(10,0)
  silkscreen extent -15.6,-6.5 15.6,6.5, body extent -15.63,-6.35 15.63,6.35, height 12
FP-DBT0030A-IPC_C [mm]
  rect 1.307x0.212 smd paste+0 mask+0: 1(-2.751,3.5)
  rrect100% 1.307x0.212 smd paste+0 mask+0: 2(-2.751,3) 3(-2.751,2.5) 4(-2.751,2) 5(-2.751,1.5) 6(-2.751,1) 7(-2.751,0.5) 8(-2.751,0) 9(-2.751,-0.5) 10(-2.751,-1) 11(-2.751,-1.5) 12(-2.751,-2) 13(-2.751,-2.5) 14(-2.751,-3) 15(-2.751,-3.5) 16(2.751,-3.5) 17(2.751,-3) 18(2.751,-2.5) 19(2.751,-2) 20(2.751,-1.5) 21(2.751,-1) 22(2.751,-0.5) 23(2.751,0) 24(2.751,0.5) 25(2.751,1) 26(2.751,1.5) 27(2.751,2) 28(2.751,2.5) 29(2.751,3) 30(2.751,3.5)
  silkscreen extent -4.1,-3.9 1.6,3.9, body extent -3.5,-4 3.5,4, height 0.25
FP-DBZ0003A-MFG [mm]
  rrect17% 1.3x0.6 smd paste+0 mask+0: 1(-1.05,0.95) 2(-1.05,-0.95) 3(1.05,0)
  silkscreen extent -0.7,-1.52 0.7,1.52, body extent -1.8,-1.62 1.8,1.62, height 0.25
FP-LPG0002A-MFG [mm]
  rect 1.07x1.7 hole 0.75 paste-2539.97 mask+0: 1(-1.27,0.21)
  rrect100% 1.07x1.7 hole 0.75 paste-2539.97 mask+0: 2(1.27,0.21)
  round 0.75 hole 0.75 unplated paste-2539.97 mask+0: ""(0,0.21)
  silkscreen extent -2.62,-0.81 0.36,0.2, body extent -2.15,-0.91 2.15,1.16, height 0.25
FP-S4B-XH-SM4-TB_LF_SN-MFG [mm]
  rect 1.3x4.5 smd paste+0 mask+0: 1(-3.75,5.05) 2(-1.25,5.05) 3(1.25,5.05) 4(3.75,5.05)
  rect 1.8x3.9 smd paste+0 mask+0: 5(-6.95,-1.75) 6(6.95,-1.75)
  silkscreen extent -7.5,-3.5 7.5,7.98, body extent -7.95,-3.8 7.95,7.4, height 0.25
FP-S-03946-IPC_C [mm]
  rect 1.274x0.536 smd paste+0 mask+0: 1(-0.835,0.95)
  rrect100% 1.274x0.536 smd paste+0 mask+0: 2(-0.835,-0.95) 3(0.835,0)
  silkscreen extent 0,-1.46 0.65,1.46, body extent -1.57,-1.56 1.57,1.56, height 0.25
H2PAK-6_STM [mil]
  rect 30x126 smd paste+0 mask+0: 1(-150,-311.5) 2(-100,-311.5) 3(-50,-311.5) 5(50,-311.5) 6(100,-311.5) 7(150,-311.5)
  rect 411x313 smd paste+0 mask+0: 4(0,109)
  silkscreen extent -210,-264 210,-60, body extent -204,-370 204,285, height 189
"HARWIN M20-7820245" [mm] "2.54mm DIL PC TAIL PIN HEADER ASSEMBLY"
  round 2 hole 1.1: 1(0,1.27) 2(0,-1.27)
  silkscreen extent -1.27,-2.7 1.27,2.73, body extent -1.25,-2.74 1.25,2.74, height 8.5
HARWIN_M20-9760442 [mm]
  rect 1.605x1.605 / inner round 1.605 / far side rect 1.605x1.605 hole 1.07: 1(-3.81,-1.27)
  round 1.605 hole 1.07: 2(-3.81,1.27) 3(-1.27,-1.27) 4(-1.27,1.27) 5(1.27,-1.27) 6(1.27,1.27) 7(3.81,-1.27) 8(3.81,1.27)
  silkscreen extent -5.74,-2.54 5.08,2.54
IEC_HighVoltage_Small [mm]
  silkscreen extent -2.72,-2.24 2.72,2.47
IEC_HotSurface_Small [mm]
  silkscreen extent -2.72,-2.36 2.72,2.35
"LED 0603_1608 GREEN" [mm] "Chip Diode, 2-Leads, Body 1.60x0.80mm, IPC Medium Density"
  rect 0.8x0.8 smd: 1(-0.75,0) 2(0.75,0)
  silkscreen extent -1.52,-0.7 1.52,0.7, body extent -0.8,-0.4 0.8,0.4, height 0.53
"MURATA GRM188 0603_1608" [mm] "Chip Capacitor, 2-Leads, Body 1.60x0.80mm"
  rect 1x1.2 smd: 1(-1,0) 2(1,0)
  silkscreen extent -1.8,-0.83 1.8,0.83, body extent -0.9,-0.5 0.9,0.5, height 1
Net-Tie_10mil [mil] "10mil net tie, no solder mask opening, no solder paste"
  rect 10x10 smd paste-5 mask-5: 1(-10,0) 2(10,0)
  Top Layer region: -6,5 6,5 6,-5 -6,-5
"ON SEMI SOT-23-3" [mm] "SOT23, 3-Leads, Body 2.90x2.40mm, Pitch 0.95mm, IPC Medium Density"
  rect 0.9x0.8 smd: 1(-1,0.95) 2(-1,-0.95) 3(1,0)
  silkscreen extent -0.7,-1.45 0.7,1.45, body extent -1.16,-1.45 1.16,1.45, height 1
PW0020A_L [mm] "SOP, 20-Leads, Body 6.6x4.5mm, Pitch 0.65mm, IPC High Density"
  rrect25% 1.2x0.4 smd: 1(-2.85,2.925) 2(-2.85,2.275) 3(-2.85,1.625) 4(-2.85,0.975) 5(-2.85,0.325) 6(-2.85,-0.325) 7(-2.85,-0.975) 8(-2.85,-1.625) 9(-2.85,-2.275) 10(-2.85,-2.925) 11(2.85,-2.925) 12(2.85,-2.275) 13(2.85,-1.625) 14(2.85,-0.975) 15(2.85,-0.325) 16(2.85,0.325) 17(2.85,0.975) 18(2.85,1.625) 19(2.85,2.275) 20(2.85,2.925)
  silkscreen extent -2.97,-3.3 1.85,3.8, body extent -3.21,-3.25 3.21,3.25, height 1
"RES 0603_1608" [mm] "Chip Resistor, 2-Leads, Body 1.60x0.80mm, IPC Medium Density"
  rect 0.85x0.95 smd: 1(-0.65,0) 2(0.65,0)
  silkscreen extent -1.27,-0.7 1.27,0.7, body extent -0.8,-0.4 0.8,0.4, height 0.45
"RES 0805_2012" [mm] "Chip Resistor, 2-Leads, Body 2.00x1.25mm, IPC Medium Density"
  rect 1.15x1.35 smd: 1(-0.875,0) 2(0.875,0)
  silkscreen extent -1.7,-0.9 1.7,0.9, body extent -1,-0.62 1,0.63, height 0.6
"RES 2512_6432" [mm] "Chip Resistor, 2-Leads, Body 6.30x3.15mm, IPC Medium Density"
  rect 1.6x3.65 smd: 1(-3.175,0) 2(3.175,0)
  silkscreen extent -4.3,-2.05 4.3,2.05, body extent -3.15,-1.57 3.15,1.57, height 0.7
SOD323 [mm] "SOD, 2-Leads, Body 1.25x2.50mm, IPC Medium Density"
  rect 0.625x0.83 smd: 1(-1.112,0) 2(1.112,0)
  silkscreen extent -1.78,-0.8 1.78,0.8, body extent -1.36,-0.62 1.36,0.62, height 1.05
SOD-123 [mm] "SOD, 2-Leads, Body 1.55x3.70mm, IPC Medium Density"
  rect 0.9x0.95 smd: 1(-1.575,0) 2(1.575,0)
  silkscreen extent -2.3,-0.92 2.41,0.92, body extent -1.86,-0.78 1.86,0.77, height 1.35
SPARK_GAP2 [mil] "Copied from PADS legacy libraries."
  round 1 smd mask-99999: 1(0,20)
  rect 10x20 smd mask-99999: 2(0,40)
  Top Layer region: -25,50 -15,50 -15,0 -5,0 -5,20 5,20 5,0 15,0 15,50 25,50 25,-10 -25,-10

## Part data
C1 C4 C7 C8 C11 C14 C16 C18 C19 C20 C21: library part 885012206048, "CAP CER 0.22UF 16V X7R 0603", Device Package="0603 (1608 Metric)", manufacturer="Würth Elektronik", Operating Temperature="-55°C ~ 125°C", Supplier Part Number 1=732-7967-1-ND, Temperature Coefficient=X7R, Tolerance=±10%, Voltage - Rated=16V, Applications="General Purpose", Capacitance="0.22 µF", componentlink1description=Datasheet, componentlink1url=https://katalog.we-online.de/pbs/datasheet/885012206048.pdf, componentlink2description="DigiKey Link", componentlink2url=https://www.digikey.com/en/products/detail/würth-elektronik/885012206048/5453822, lastupdated="2/9/2024 8:10:22 PM", Lifecycle Status=Active, Minimum Order=1, Mounting Type="Surface Mount, MLCC", Package / Case="0603 (1608 Metric)", packaging=TapeAndReel, Part Number=885012206048, Part Status=Active, partid=8781, price=0.03, series=WCAP-CSGP, Size / Dimension="0.063\" L x 0.031\" W (1.60mm x 0.80mm)", Supplier 1=DigiKey, Thickness (Max)="0.034\" (0.87mm)"
C2 C5: library part CL32B106KLJNNNE, "CAP CER 10UF 35V X7R 1210", Device Package="1210 (3225 Metric)", manufacturer="Samsung Electro-Mechanics", Operating Temperature="-55°C ~ 125°C", Supplier Part Number 1=1276-3389-1-ND, Temperature Coefficient=X7R, Tolerance=±10%, Voltage - Rated=35V, Applications="General Purpose", Capacitance="10 µF", componentlink1description=Datasheet, componentlink1url=http://www.samsungsem.com/kr/support/product-search/mlcc/CL32B106KLJNNNE.jsp, componentlink2description="DigiKey Link", componentlink2url=https://www.digikey.com/en/products/detail/samsung-electro-mechanics/CL32B106KLJNNNE/3889047, lastupdated="6/4/2024 7:20:58 PM", Lifecycle Status=Active, Minimum Order=1, Mounting Type="Surface Mount, MLCC", Package / Case="1210 (3225 Metric)", packaging=TapeAndReel, Part Number=CL32B106KLJNNNE, Part Status=Active, partid=41408, price=0.08, series=CL, Size / Dimension="0.126\" L x 0.098\" W (3.20mm x 2.50mm)", Supplier 1=DigiKey, Thickness (Max)="0.106\" (2.70mm)"
C3 C6: library part GCJ21BR71H105KA01L, "CAP CER 1UF 50V X7R 0805", Device Package="0805 (2012 Metric)", manufacturer="Murata Electronics", Operating Temperature="-55°C ~ 125°C", Ratings=AEC-Q200, Supplier Part Number 1=490-10667-1-ND, Temperature Coefficient=X7R, Tolerance=±10%, Voltage - Rated=50V, Applications="Automotive, Boardflex Sensitive", Capacitance="1 µF", componentlink1description=Datasheet, componentlink1url=https://www.murata.com/~/media/webrenewal/support/library/catalog/products/capacitor/mlcc/c03e.ashx?la=en-us, componentlink2description="DigiKey Link", componentlink2url=https://www.digikey.com/en/products/detail/murata-electronics/GCJ21BR71H105KA01L/4903512, Features="Soft Termination", lastupdated="2/9/2024 8:16:08 PM", Lifecycle Status=Active, Minimum Order=1, Mounting Type="Surface Mount, MLCC", Package / Case="0805 (2012 Metric)", packaging=TapeAndReel, Part Number=GCJ21BR71H105KA01L, Part Status=Active, partid=2709, price=0.05, series=GCJ, Size / Dimension="0.079\" L x 0.049\" W (2.00mm x 1.25mm)", Supplier 1=DigiKey, Thickness (Max)="0.057\" (1.45mm)"
C9 C13: library part 885012206087, "CAP CER 4700PF 50V X7R 0603", Device Package="0603 (1608 Metric)", manufacturer="Würth Elektronik", Operating Temperature="-55°C ~ 125°C", Supplier Part Number 1=732-8005-1-ND, Temperature Coefficient=X7R, Tolerance=±10%, Voltage - Rated=50V, Applications="General Purpose", Capacitance="4700 pF", componentlink1description=Datasheet, componentlink1url=https://katalog.we-online.de/pbs/datasheet/885012206087.pdf, componentlink2description="DigiKey Link", componentlink2url=https://www.digikey.com/en/products/detail/würth-elektronik/885012206087/5453860, lastupdated="2/9/2024 8:10:29 PM", Lifecycle Status=Active, Minimum Order=1, Mounting Type="Surface Mount, MLCC", Package / Case="0603 (1608 Metric)", packaging=TapeAndReel, Part Number=885012206087, Part Status=Active, partid=3486, price=0.01, series=WCAP-CSGP, Size / Dimension="0.063\" L x 0.031\" W (1.60mm x 0.80mm)", Supplier 1=DigiKey, Thickness (Max)="0.037\" (0.95mm)"
C10 C15: library part 885012206052, "CAP CER 1UF 16V X7R 0603", Device Package="0603 (1608 Metric)", manufacturer="Würth Elektronik", Operating Temperature="-55°C ~ 125°C", Supplier Part Number 1=732-7971-1-ND, Temperature Coefficient=X7R, Tolerance=±10%, Voltage - Rated=16V, Applications="General Purpose", Capacitance="1 µF", componentlink1description=Datasheet, componentlink1url=https://katalog.we-online.de/pbs/datasheet/885012206052.pdf, componentlink2description="DigiKey Link", componentlink2url=https://www.digikey.com/en/products/detail/würth-elektronik/885012206052/5453826, lastupdated="2/9/2024 8:10:16 PM", Lifecycle Status=Active, Minimum Order=1, Mounting Type="Surface Mount, MLCC", Package / Case="0603 (1608 Metric)", packaging=TapeAndReel, Part Number=885012206052, Part Status=Active, partid=13198, price=0.11, series=WCAP-CSGP, Size / Dimension="0.063\" L x 0.031\" W (1.60mm x 0.80mm)", Supplier 1=DigiKey, Thickness (Max)="0.037\" (0.95mm)"
C12 C31: library part 885012207025, "CAP CER 4.7UF 10V X7R 0805", Device Package="0805 (2012 Metric)", manufacturer="Würth Elektronik", Operating Temperature="-55°C ~ 125°C", Supplier Part Number 1=732-7657-1-ND, Temperature Coefficient=X7R, Tolerance=±10%, Voltage - Rated=10V, Applications="General Purpose", Capacitance="4.7 µF", componentlink1description=Datasheet, componentlink1url=https://katalog.we-online.de/pbs/datasheet/885012207025.pdf, componentlink2description="DigiKey Link", componentlink2url=https://www.digikey.com/en/products/detail/würth-elektronik/885012207025/5453512, lastupdated="2/9/2024 8:15:22 PM", Lifecycle Status=Active, Minimum Order=1, Mounting Type="Surface Mount, MLCC", Package / Case="0805 (2012 Metric)", packaging=TapeAndReel, Part Number=885012207025, Part Status=Active, partid=17499, price=0.55, series=WCAP-CSGP, Size / Dimension="0.079\" L x 0.049\" W (2.00mm x 1.25mm)", Supplier 1=DigiKey, Thickness (Max)="0.057\" (1.45mm)"
C17: library part 885012206081, "CAP CER 470PF 50V X7R 0603", Device Package="0603 (1608 Metric)", manufacturer="Würth Elektronik", Operating Temperature="-55°C ~ 125°C", Supplier Part Number 1=732-7999-1-ND, Temperature Coefficient=X7R, Tolerance=±10%, Voltage - Rated=50V, Applications="General Purpose", Capacitance="470 pF", componentlink1description=Datasheet, componentlink1url=https://katalog.we-online.de/pbs/datasheet/885012206081.pdf, componentlink2description="DigiKey Link", componentlink2url=https://www.digikey.com/en/products/detail/würth-elektronik/885012206081/5453854, lastupdated="2/9/2024 8:10:11 PM", Lifecycle Status=Active, Minimum Order=1, Mounting Type="Surface Mount, MLCC", Package / Case="0603 (1608 Metric)", packaging=TapeAndReel, Part Number=885012206081, Part Status=Active, partid=15743, price=0.02, series=WCAP-CSGP, Size / Dimension="0.063\" L x 0.031\" W (1.60mm x 0.80mm)", Supplier 1=DigiKey, Thickness (Max)="0.037\" (0.95mm)"
C22 C24: library part GRM188R72A104KA35D, "CAP CER 0.1UF 100V X7R 0603", Device Package="0603 (1608 Metric)", manufacturer="Murata Electronics", Operating Temperature="-55°C ~ 125°C", Supplier Part Number 1=490-3285-1-ND, Temperature Coefficient=X7R, Tolerance=±10%, Voltage - Rated=100V, Applications="General Purpose", Capacitance="0.1 µF", componentlink1description=Datasheet, componentlink1url=https://www.murata.com/~/media/webrenewal/support/library/catalog/products/capacitor/mlcc/c02e.ashx?la=en-us, componentlink2description="DigiKey Link", componentlink2url=https://www.digikey.com/en/products/detail/murata-electronics/GRM188R72A104KA35D/702549, lastupdated="7/20/2024 12:23:21 AM", Lifecycle Status=Active, Minimum Order=1, Mounting Type="Surface Mount, MLCC", Package / Case="0603 (1608 Metric)", packaging=TapeAndReel, Part Number=GRM188R72A104KA35D, Part Status=Active, partid=9563, price=0.02, series=GRM, Size / Dimension="0.063\" L x 0.031\" W (1.60mm x 0.80mm)", Supplier 1=DigiKey, Thickness (Max)="0.035\" (0.90mm)"
C23 C25 C26: library part 885012206095, "CAP CER 0.1UF 50V X7R 0603", Device Package="0603 (1608 Metric)", manufacturer="Würth Elektronik", Operating Temperature="-55°C ~ 125°C", Supplier Part Number 1=732-8013-1-ND, Temperature Coefficient=X7R, Tolerance=±10%, Voltage - Rated=50V, Applications="General Purpose", Capacitance="0.1 µF", componentlink1description=Datasheet, componentlink1url=https://katalog.we-online.de/pbs/datasheet/885012206095.pdf, componentlink2description="DigiKey Link", componentlink2url=https://www.digikey.com/en/products/detail/würth-elektronik/885012206095/5453868, lastupdated="2/9/2024 8:10:15 PM", Lifecycle Status=Active, Minimum Order=1, Mounting Type="Surface Mount, MLCC", Package / Case="0603 (1608 Metric)", packaging=TapeAndReel, Part Number=885012206095, Part Status=Active, partid=14053, price=0.02, series=WCAP-CSGP, Size / Dimension="0.063\" L x 0.031\" W (1.60mm x 0.80mm)", Supplier 1=DigiKey, Thickness (Max)="0.037\" (0.95mm)"
C27 C28: library part 885342208002, "CAP CER 0.1UF 200V X7R 1206", Device Package="1206 (3216 Metric)", manufacturer="Würth Elektronik", Operating Temperature="-55°C ~ 125°C", Supplier Part Number 1=732-12081-1-ND, Temperature Coefficient=X7R, Tolerance=±10%, Voltage - Rated=200V, Applications="General Purpose", Capacitance="0.1 µF", componentlink1description=Datasheet, componentlink1url=https://katalog.we-online.de/pbs/datasheet/885342208002.pdf, componentlink2description="DigiKey Link", componentlink2url=https://www.digikey.com/en/products/detail/würth-elektronik/885342208002/9345893, lastupdated="6/4/2024 7:10:36 PM", Lifecycle Status=Active, Minimum Order=1, Mounting Type="Surface Mount, MLCC", Package / Case="1206 (3216 Metric)", packaging=TapeAndReel, Part Number=885342208002, Part Status=Active, partid=21012, price=0.10, series=WCAP-CSMH, Size / Dimension="0.126\" L x 0.063\" W (3.20mm x 1.60mm)", Supplier 1=DigiKey, Thickness (Max)="0.071\" (1.80mm)"
C29 C32: library part 885012206046, "CAP CER 0.1UF 16V X7R 0603", Device Package="0603 (1608 Metric)", manufacturer="Würth Elektronik", Operating Temperature="-55°C ~ 125°C", Supplier Part Number 1=732-7965-1-ND, Temperature Coefficient=X7R, Tolerance=±10%, Voltage - Rated=16V, Applications="General Purpose", Capacitance="0.1 µF", componentlink1description=Datasheet, componentlink1url=https://katalog.we-online.de/pbs/datasheet/885012206046.pdf, componentlink2description="DigiKey Link", componentlink2url=https://www.digikey.com/en/products/detail/würth-elektronik/885012206046/5453820, lastupdated="2/9/2024 8:10:12 PM", Lifecycle Status=Active, Minimum Order=1, Mounting Type="Surface Mount, MLCC", Package / Case="0603 (1608 Metric)", packaging=TapeAndReel, Part Number=885012206046, Part Status=Active, partid=15291, price=0.03, series=WCAP-CSGP, Size / Dimension="0.063\" L x 0.031\" W (1.60mm x 0.80mm)", Supplier 1=DigiKey, Thickness (Max)="0.034\" (0.87mm)"
C30: library part 885012206036, "CAP CER 2200PF 16V X7R 0603", Device Package="0603 (1608 Metric)", manufacturer="Würth Elektronik", Operating Temperature="-55°C ~ 125°C", Supplier Part Number 1=732-7955-1-ND, Temperature Coefficient=X7R, Tolerance=±10%, Voltage - Rated=16V, Applications="General Purpose", Capacitance="2200 pF", componentlink1description=Datasheet, componentlink1url=https://katalog.we-online.de/pbs/datasheet/885012206036.pdf, componentlink2description="DigiKey Link", componentlink2url=https://www.digikey.com/en/products/detail/würth-elektronik/885012206036/5453810, lastupdated="2/9/2024 8:10:11 PM", Lifecycle Status=Active, Minimum Order=1, Mounting Type="Surface Mount, MLCC", Package / Case="0603 (1608 Metric)", packaging=TapeAndReel, Part Number=885012206036, Part Status=Active, partid=15804, price=0.02, series=WCAP-CSGP, Size / Dimension="0.063\" L x 0.031\" W (1.60mm x 0.80mm)", Supplier 1=DigiKey, Thickness (Max)="0.034\" (0.87mm)"
C33 C36: library part GCD188R71H152KA01D, "CAP CER", Device Package="0603 (1608 Metric)", manufacturer="Murata Electronics", Operating Temperature="-55°C ~ 125°C", Ratings=AEC-Q200, Supplier Part Number 1=490-GCD188R71H152KA01DCT-ND, Temperature Coefficient=X7R, Tolerance=±10%, Voltage - Rated=50V, Applications=Automotive, Capacitance="1500 pF", componentlink2description="DigiKey Link", componentlink2url=https://www.digikey.com/en/products/detail/murata-electronics/GCD188R71H152KA01D/10703700, lastupdated="2/9/2024 8:09:40 PM", Lifecycle Status=Active, Minimum Order=1, Mounting Type="Surface Mount, MLCC", Package / Case="0603 (1608 Metric)", packaging=TapeAndReel, Part Number=GCD188R71H152KA01D, Part Status=Active, partid=48290, price=0.01, series=GCD, Size / Dimension="0.063\" L x 0.031\" W (1.60mm x 0.80mm)", Supplier 1=DigiKey, Thickness (Max)="0.035\" (0.90mm)"
C34: library part TR3B475K025C0700, "CAP TANT 4.7UF 10% 25V 1411", Device Package="1411 (3528 Metric)", ESR (Equivalent Series Resistance)=700mOhm, manufacturer="Vishay Sprague", Manufacturer Size Code=B, Operating Temperature="-55°C ~ 125°C", Supplier Part Number 1=718-1523-1-ND, Tolerance=±10%, Voltage - Rated="25 V", Capacitance="4.7 µF", componentlink1description=Datasheet, componentlink1url=http://www.vishay.com/docs/40080/tr3.pdf, componentlink2description="DigiKey Link", componentlink2url=https://www.digikey.com/en/products/detail/vishay-sprague/TR3B475K025C0700/1859840, Features="General Purpose", Height - Seated (Max)="0.083\" (2.11mm)", lastupdated="6/3/2024 7:29:03 PM", Lifecycle Status=Active, Minimum Order=1, Mounting Type="Surface Mount", Package / Case="1411 (3528 Metric)", packaging=TapeAndReel, Part Number=TR3B475K025C0700, Part Status=Active, partid=2, price=0.42, series="TANTAMOUNT™, TR3", Size / Dimension="0.138\" L x 0.110\" W (3.50mm x 2.80mm)", Supplier 1=DigiKey, Type=Molded
C35: library part NMC0603X7R103K50TRPF, "CAP SMT06030.01UF50VDC", Device Package="0603 (1608 Metric)", manufacturer="NIC Components Corp", Operating Temperature="-55°C ~ 125°C", Supplier Part Number 1=4988-NMC0603X7R103K50TRPFCT-ND, Temperature Coefficient=X7R, Tolerance=±10%, Voltage - Rated=50V, Applications="General Purpose", Capacitance="10000 pF", componentlink1description=Datasheet, componentlink1url=https://media.digikey.com/pdf/Data%20Sheets/Nic%20Components%20PDFs/NMC%20Series%20X7R.pdf, componentlink2description="DigiKey Link", componentlink2url=https://www.digikey.com/en/products/detail/nic-components-corp/NMC0603X7R103K50TRPF/18724525, Features="Low ESL, Ultra Low ESR", lastupdated="2/9/2024 8:09:07 PM", Lifecycle Status=Active, Minimum Order=1, Mounting Type="Surface Mount, MLCC", Package / Case="0603 (1608 Metric)", packaging=TapeAndReel, Part Number=NMC0603X7R103K50TRPF, Part Status=Active, partid=54437, price=0.01, series=NMC, Size / Dimension="0.063\" L x 0.031\" W (1.60mm x 0.80mm)", Supplier 1=DigiKey, Thickness (Max)="0.039\" (1.00mm)"
D1 D3 D5: "DIODE GEN PURP 100V 300MA SOD123", Capacitance @ Vr, F="2pF @ 0V, 1MHz", Current - Average Rectified (Io)=300mA, Current - Reverse Leakage @ Vr="1 µA @ 100 V", manufacturer="Diodes Incorporated", Operating Temperature - Junction="-55°C ~ 150°C", Package / Case=SOD-123, Supplier Part Number 1=1N4148W-FDICT-ND, Voltage - DC Reverse (Vr) (Max)="100 V", Voltage - Forward (Vf) (Max) @ If="1.25 V @ 150 mA", componentlink1description=Datasheet, componentlink1url=https://www.diodes.com/assets/Datasheets/ds30086.pdf, componentlink2description="DigiKey Link", componentlink2url=https://www.digikey.com/en/products/detail/diodes-incorporated/1N4148W-7-F/814371, Diode Type=Standard, lastupdated="6/3/2024 7:54:46 PM", Lifecycle Status=Active, Minimum Order=1, Mounting Type="Surface Mount", packaging=TapeAndReel, Part Number=1N4148W-7-F, Part Status=Active, partid=1002, price=0.02, Reverse Recovery Time (trr)="4 ns", series=-, Speed="Fast Recovery =< 500ns, > 200mA (Io)", Supplier 1=DigiKey, Supplier Device Package=SOD-123
D2 D4 D6 D7 D8 D9 D10 D11 D12 D17 D18 D19 D20 D21 D22: "DIODE ZENER 5.6V 200MW SOD323", Current - Reverse Leakage @ Vr="5 µA @ 3 V", manufacturer="Diodes Incorporated", Operating Temperature="-65°C ~ 150°C", Package / Case="SC-76, SOD-323", Power - Max="200 mW", Supplier Device Package=SOD-323, Supplier Part Number 1=MMSZ5232BS-FDICT-ND, Tolerance=±5%, Voltage - Forward (Vf) (Max) @ If="900 mV @ 10 mA", Voltage - Zener (Nom) (Vz)="5.6 V", componentlink1description=Datasheet, componentlink1url=https://www.diodes.com/assets/Datasheets/ds31038.pdf, componentlink2description="DigiKey Link", componentlink2url=https://www.digikey.com/en/products/detail/diodes-incorporated/MMSZ5232BS-7-F/814356, Impedance (Max) (Zzt)="11 Ohms", lastupdated="6/3/2024 8:20:26 PM", Lifecycle Status=Active, Minimum Order=1, Mounting Type="Surface Mount", packaging=TapeAndReel, Part Number=MMSZ5232BS-7-F, Part Status=Active, partid=3555, price=0.03, series=-, Supplier 1=DigiKey
D13: "DIODE GEN PURP 100V 200MA SOD123", Current - Average Rectified (Io)="200mA (DC)", Current - Reverse Leakage @ Vr="5µA @ 75V", manufacturer="ON Semiconductor", Operating Temperature - Junction="-55°C ~ 150°C", Package / Case=SOD-123, Supplier Part Number 1=MMSD914T1GOSCT-ND, Voltage - DC Reverse (Vr) (Max)=100V, Voltage - Forward (Vf) (Max) @ If="1V @ 10mA", componentlink1description=Datasheet, componentlink1url=http://www.onsemi.com/pub/Collateral/MMSD914T1-D.PDF, componentlink2description="DigiKey Link", componentlink2url=http://digikey.com/product-detail/en/on-semiconductor/MMSD914T1G/MMSD914T1GOSCT-ND/1139868, Diode Type=Standard, lastupdated="6/3/2024 7:54:45 PM", Lifecycle Status=Active, Minimum Order=1, Mounting Type="Surface Mount", packaging=TapeAndReel, Part Number=MMSD914T1G, Part Status=Active, partid=1020, price=0.03, Reverse Recovery Time (trr)=4ns, series=-, Speed="Small Signal =< 200mA (Io), Any Speed", Supplier 1=DigiKey, Supplier Device Package=SOD-123
D14: "DIODE GEN PURP 600V 3A SMC", Current - Average Rectified (Io)=3A, Current - Reverse Leakage @ Vr="10µA @ 600V", manufacturer="ON Semiconductor", Operating Temperature - Junction="-65°C ~ 175°C", Package / Case="DO-214AB, SMC", Supplier Device Package=SMC, Supplier Part Number 1=MURS360T3GOSCT-ND, Voltage - DC Reverse (Vr) (Max)=600V, Voltage - Forward (Vf) (Max) @ If="1.25V @ 3A", componentlink1description=Datasheet, componentlink1url=http://www.onsemi.com/pub/Collateral/MURS320T3-D.PDF, componentlink2description="DigiKey Link", componentlink2url=http://digikey.com/product-detail/en/on-semiconductor/MURS360T3G/MURS360T3GOSCT-ND/964580, Diode Type=Standard, lastupdated="6/3/2024 7:54:13 PM", Lifecycle Status=Active, Minimum Order=1, Mounting Type="Surface Mount", packaging=TapeAndReel, Part Number=MURS360T3G, Part Status=Active, partid=485, price=0.16, Reverse Recovery Time (trr)=75ns, series=-, Speed="Fast Recovery =< 500ns, > 200mA (Io)", Supplier 1=DigiKey
D15: "TVS DIODE 75VWM 121VC SMC", Current - Peak Pulse (10/1000µs)=12.4A, manufacturer="Diodes Incorporated", Operating Temperature="-55°C ~ 150°C (TJ)", Package / Case="DO-214AB, SMC", Power - Peak Pulse="1500W (1.5kW)", Power Line Protection=No, Supplier Device Package=SMC, Supplier Part Number 1=SMCJ75A-FDICT-ND, Voltage - Breakdown (Min)=83.3V, Voltage - Clamping (Max) @ Ipp=121V, Voltage - Reverse Standoff (Typ)=75V, Applications="General Purpose", componentlink1description=Datasheet, componentlink1url=https://www.diodes.com/assets/Datasheets/ds19003.pdf, componentlink2description="DigiKey Link", componentlink2url=https://www.digikey.com/en/products/detail/diodes-incorporated/SMCJ75A-13-F/765441, lastupdated="6/3/2024 7:57:03 PM", Lifecycle Status=Active, Minimum Order=1, Mounting Type="Surface Mount", packaging=TapeAndReel, Part Number=SMCJ75A-13-F, Part Status=Active, partid=6503, price=0.23, series=-, Supplier 1=DigiKey, Type=Zener, Unidirectional Channels=1
D16: "DIODE ZENER 16V 500MW SOD123", Current - Reverse Leakage @ Vr="100 nA @ 12 V", manufacturer="Diodes Incorporated", Operating Temperature="-65°C ~ 150°C", Package / Case=SOD-123, Power - Max="500 mW", Supplier Part Number 1=MMSZ5246B-FDICT-ND, Tolerance=±5%, Voltage - Forward (Vf) (Max) @ If="900 mV @ 10 mA", Voltage - Zener (Nom) (Vz)="16 V", componentlink1description=Datasheet, componentlink1url=https://www.diodes.com/assets/Datasheets/ds18010.pdf, componentlink2description="DigiKey Link", componentlink2url=https://www.digikey.com/en/products/detail/diodes-incorporated/MMSZ5246B-7-F/717793, Impedance (Max) (Zzt)="17 Ohms", lastupdated="6/3/2024 7:55:47 PM", Lifecycle Status=Active, Minimum Order=1, Mounting Type="Surface Mount", packaging=TapeAndReel, Part Number=MMSZ5246B-7-F, Part Status=Active, partid=1896, price=0.02, series=-, Supplier 1=DigiKey, Supplier Device Package=SOD-123
D23 D24 D25 D26: library part 150060GS75000, "LED GREEN CLEAR 0603 SMD", Current - Test=20mA, Device Package="0603 (1608 Metric)", Lens Color=Colorless, manufacturer="Würth Elektronik", Millicandela Rating=430mcd, Supplier Device Package=0603, Supplier Part Number 1=732-4971-1-ND, Voltage - Forward (Vf) (Typ)=3.2V, Color=Green, componentlink1description=Datasheet, componentlink1url=https://katalog.we-online.de/led/datasheet/150060GS75000.pdf, componentlink2description="DigiKey Link", componentlink2url=https://www.digikey.com/en/products/detail/würth-elektronik/150060GS75000/4489898, Configuration=Standard, Height (Max)=0.80mm, lastupdated="6/3/2024 7:58:51 PM", Lens Size="1.10mm x 0.70mm", Lens Style="Rectangle with Flat Top", Lens Transparency=Clear, Lifecycle Status=Active, Minimum Order=1, Mounting Type="Surface Mount", Package / Case="0603 (1608 Metric)", packaging=TapeAndReel, Part Number=150060GS75000, Part Status=Active, partid=686, price=0.11, series=WL-SMCW, Size / Dimension="1.60mm L x 0.80mm W", Supplier 1=DigiKey, Viewing Angle=140°, Wavelength - Dominant=520nm, Wavelength - Peak=515nm
E1 E2 E3 E4 E5 E6 E7: library part SPARKGAP, "Spark Gap", Alternate Manufacturer=-, Alternate PartNumber=-, CompType="Spark Gap", LatestRevisionDate=2013-09-07, LatestRevisionNote="Added Alternate PartNumber and Alternate Manufacturer parameters to appropriate components.", manufacturer=N/A, MountType=N/A, PartNumber=N/A, Publisher="Texas Instruments", SymbolCreator=a0412235, SymbolVersion=2013-07-11
FB1 FB2 FB3 FB4: "Chip Ferrite Bead, 0603, 220Ω @ 100MHz, 25%, 0.04Ω, 2.5A", Case Code (Imperial)=0603, Case Code (Metric)=1608, Current Rating=2.5A, DC Resistance (DCR)=40mR, Max Operating Temperature=125°C, Min Operating Temperature=-55°C, Package Quantity=1, Supplier Part Number 1=81-BLM18SG221TN1D, Test Frequency=100MHz, Tolerance=25%, Case/Package=0603, Core Material=Ferrite, DC Current=2.5A, DC Resistance-Max=40mR, Depth=0.95mm, Height=0.8mm, Impedance=220R, Lead Free="Lead Free", Length=1.6mm, Material=Ferrite, Max Current Rating=2.5A, Max DC Current=2.5A, Number of Circuits=1, Number of Lines=1, Number of Pins=2, packaging="Tape and Reel", Radiation Hardening=No, REACH SVHC="No SVHC", RoHS Compliant=Yes, series=BLM18S, Supplier 1=Mouser, Termination=SMD/SMT, Weight=7.1E-05oz, Width=0.8mm
HS1 HS2 HS3 HS4: library part CMP-33535-000010-1, "TO-268 HEAT SINK /POLY TAPE", Case/Package=TO-268, Color=Black, Package Quantity=250, Finish=Anodized, Height=10.16mm, Length=31mm, Mount="Surface Mount", packaging="Tape and Reel", RoHS Compliant=Yes, series=D, Type=Passive, Width=12.7mm
J1 J2 J4 J5: library part 7461147, "7461147 REDCUBE Power Element Poles, 180A, Press-Fit, M5 Internal Thread, Vertical, WP-BUFU", Current Rating=180A, Max Operating Temperature=150°C, Min Operating Temperature=-55°C, Supplier Part Number 1=732-3215-ND, Contact Material=Copper, Contact Plating=Tin, Height=10.5mm, Insulation=Non-Insulated, Length=9mm, Material=Brass, Mount="Through Hole", NexarPartId=18187424, Number of Contacts=16, Number of Pins=16, packaging=Bulk, REACH SVHC=Unknown, RoHS=Compliant, Supplier 1=Digikey, Termination=Press-Fit, Thread Size=M5, Width=9mm
J3 J8 J9: library part S4B-XH-SM4-TB, "CONN HEADER SMD R/A 4POS 2.5MM", Color=Natural, Contact Resistance=20mR, Housing Color=Beige, Max Current Rating=3A, Max Operating Temperature=85°C, Max Voltage Rating (AC)=250V, Min Operating Temperature=-25°C, Package Quantity=1, Supplier Part Number 1=306-S4BXHSM4TBLFSN, Connector Type="Male Pin", Contact Material="Copper Alloy", Contact Plating=Tin, Contact Type="Male Pin", Depth=10mm, Gender=Male, Housing Material=Polyamide, Lead Free="Lead Free", Length=15mm, Mount="Surface Mount", Number of Contacts=4, Number of Positions=4, Number of Rows=1, Orientation="Right Angle", packaging="Tape and Reel", Pitch=0.098inch, REACH SVHC="No SVHC", series=XH, Supplier 1=Mouser, Termination=Solder
J6: "CONN RCPT 2POS 0.1 GOLD PCB", Current Rating (Amps)=3A, Insulation Color=Black, manufacturer="Harwin Inc.", Material Flammability Rating="UL94 V-0", Operating Temperature="-40°C ~ 105°C", Supplier Part Number 1=952-1775-ND, componentlink1description=Datasheet, componentlink1url=https://cdn.harwin.com/pdfs/C001XX_M20_Series_Connectors.pdf, componentlink2description="DigiKey Link", componentlink2url=https://www.digikey.com/en/products/detail/harwin-inc/M20-7820242/3727744, Connector Type=Receptacle, Contact Finish - Mating=Gold, Contact Finish - Post=Tin, Contact Finish Thickness - Mating=Flash, Contact Length - Post="0.118\" (3.00mm)", Contact Type="Female Socket", Fastening Type=Push-Pull, Insulation Height="0.335\" (8.51mm)", lastupdated="9/21/2022 6:53:47 PM", Lifecycle Status=Active, Mated Stacking Heights="11.04mm, 12.63mm", Minimum Order=1, Mounting Type="Through Hole", Number of Positions=2, Number of Positions Loaded=All, Number of Rows=1, packaging=Tube, Part Number=M20-7820242, Part Status=Active, Pitch - Mating="0.100\" (2.54mm)", price=0.38, series=M20, Style="Board to Board or Cable", Supplier 1=DigiKey, Termination=Solder
J7: Package=None, Availability=Unavailable, MP=M20-9760442, price=None
J10: library part "Test Point", "PC TEST POINT MINIATURE", manufacturer=keystone, Automotive=No, Category=Conn, componentlink2description=Datasheet, componentlink2url=http://www.keyelco.com/product-pdf.cfm?p=1353, Conn Orientation=Straight, Contact Material=Silver, Device Class L1=Connectors, Device Class L2=unset, Device Class L3=unset, Digikey Description="PC TEST POINT MINIATURE", Height=1.65mm, Lead Free=Yes, Manufacturer Part Number=5015, Number of Contacts=1, Octopart=https://octopart.com/5015-keystone-3822, Package=5015, RoHS=TRUE
Logo2: library part IEC_HotSurface, "IEC 61010-1 Hot Surface Warning"
Logo3: library part IEC_HighVoltage, "IEC 61010-1 High Voltage Warning"
MP1 MP2 MP3 MP4: library part CMP-03913-89311597-1, "9774050482R WA-SMSI SMT Steel Spacer, M4 Internal non Stop", Max Operating Temperature=150°C, Min Operating Temperature=-55°C, Length=5mm, Material=Steel, NexarPartId=89311597, packaging="Tape and Reel", RoHS=Compliant, Width=8.2mm
NT1: "Single point connection between nets.", LatestRevisionDate=2012-11-28, LatestRevisionNote="Added Alternate PartNumber and Alternate Manufacturer parameters to appropriate components.", MountType=SMT, Publisher="Texas Instruments", SymbolCreator=codlsc, SymbolVersion=2009-07-01